# Altium PCB operacake.PcbDoc
Units mm, origin at the board's own origin, x right, y up, seen from the top; angles counter-clockwise.
Board outline 120 x 75 mm, 4 copper layers (F.Cu, In1.Cu, In2.Cu, B.Cu); 152 components, 63 nets, 801 pads, 182 vias.
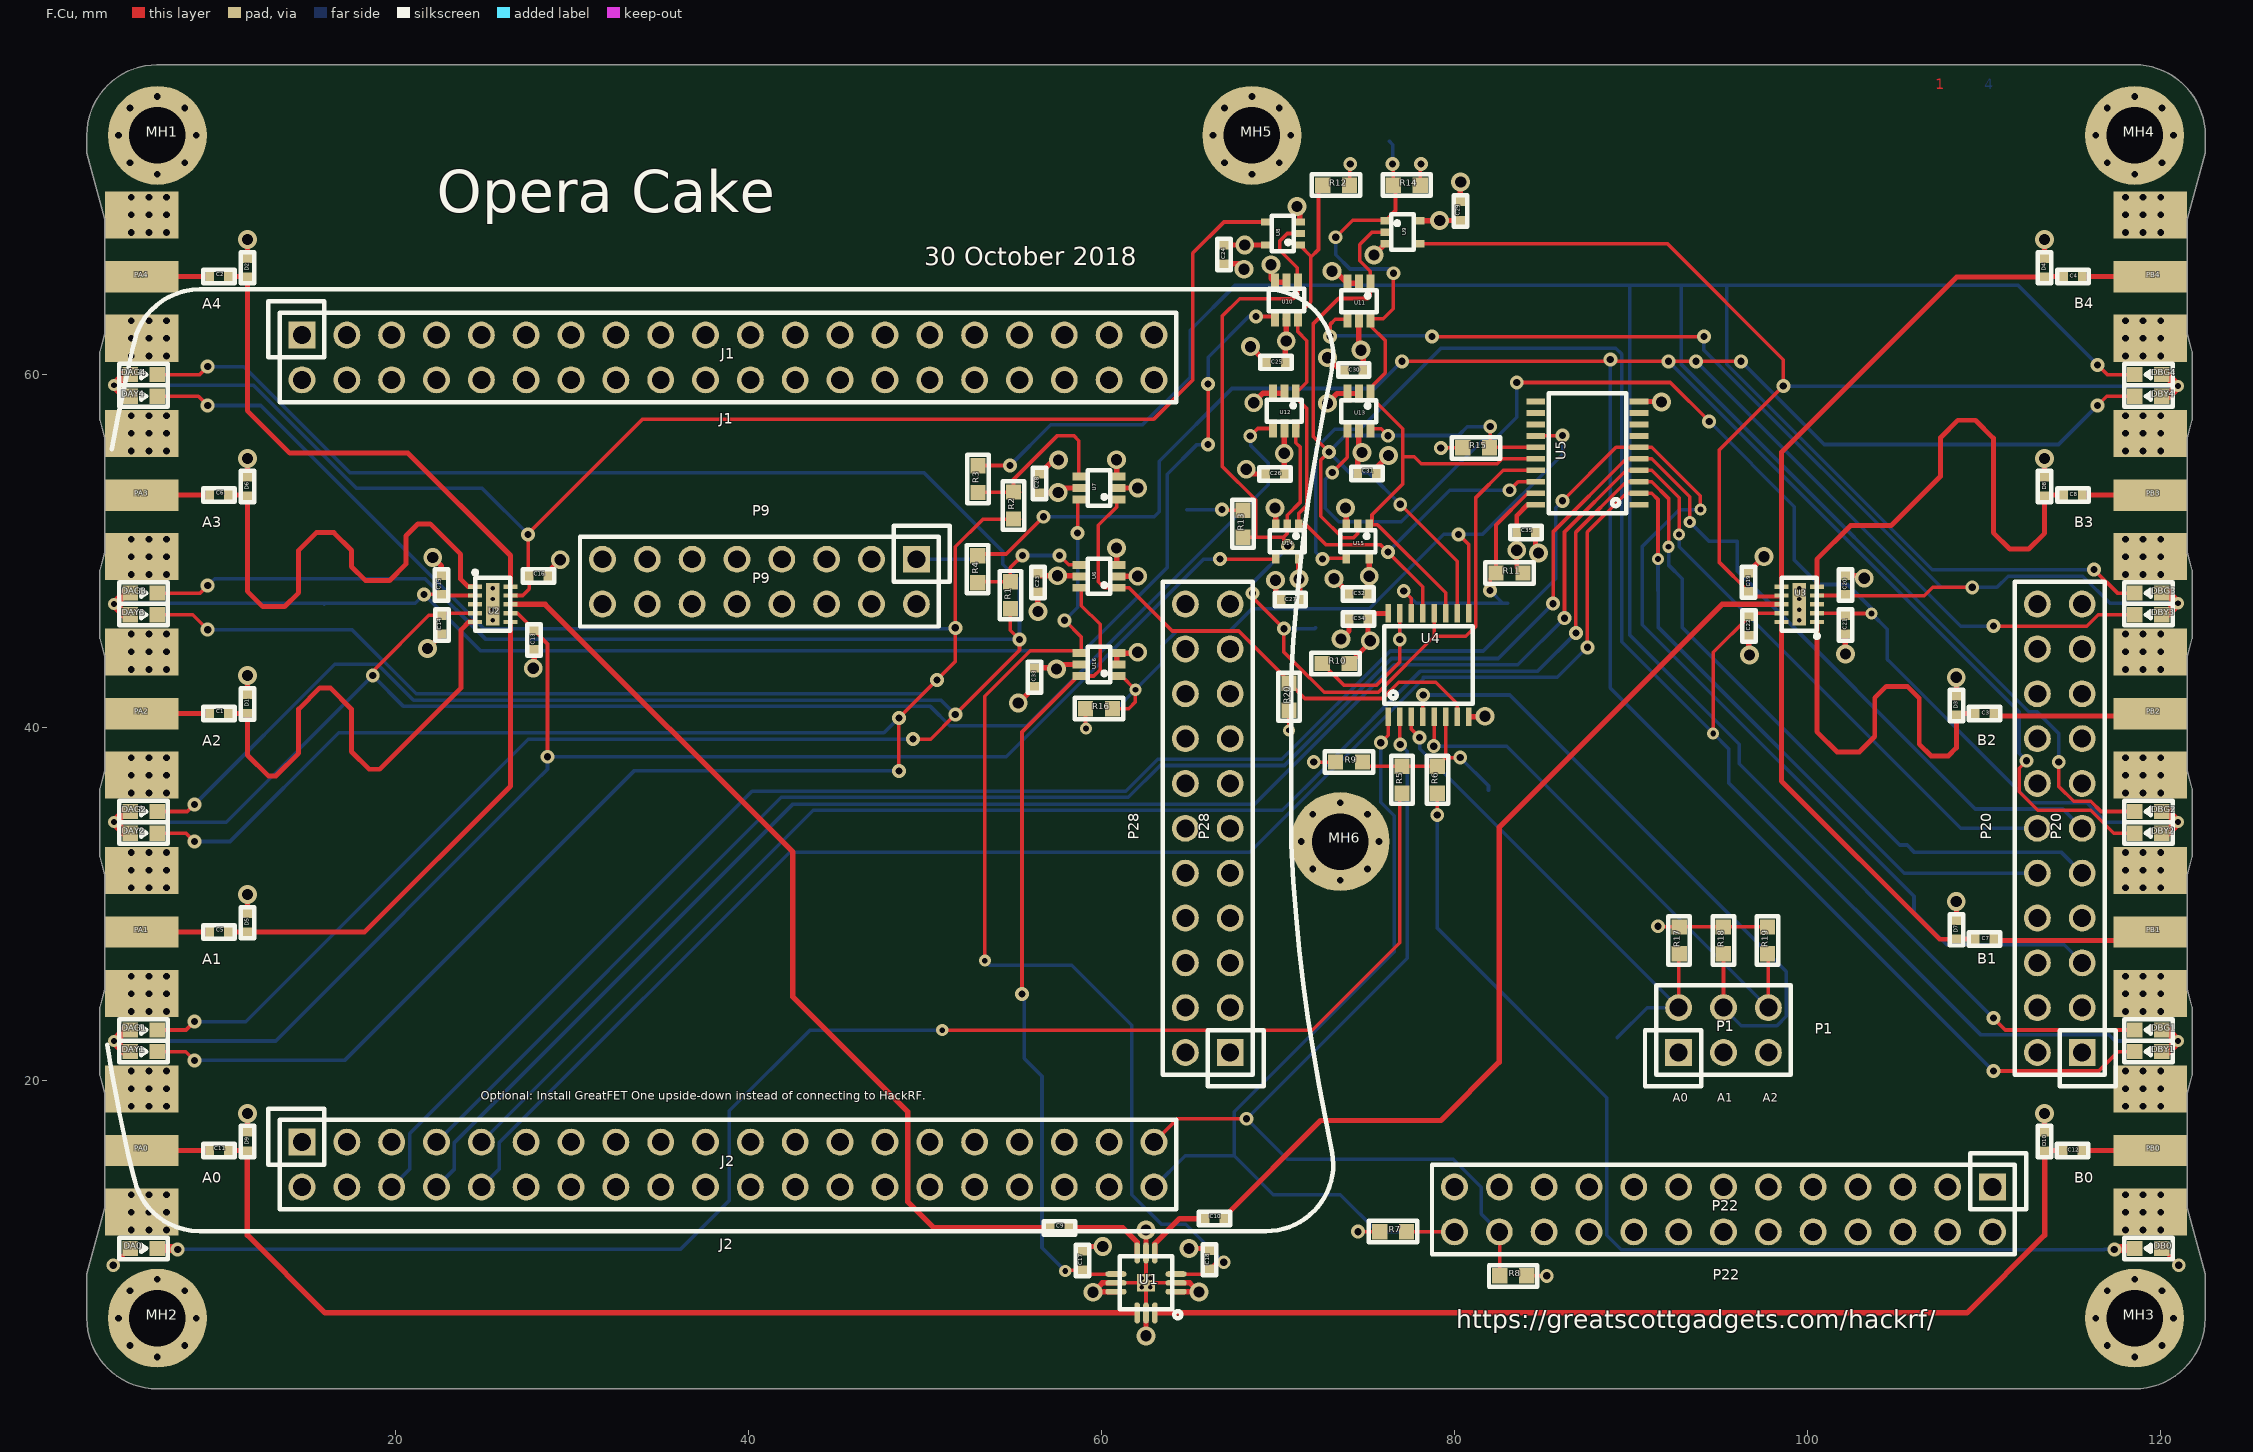
[diagram p0: F.Cu view]
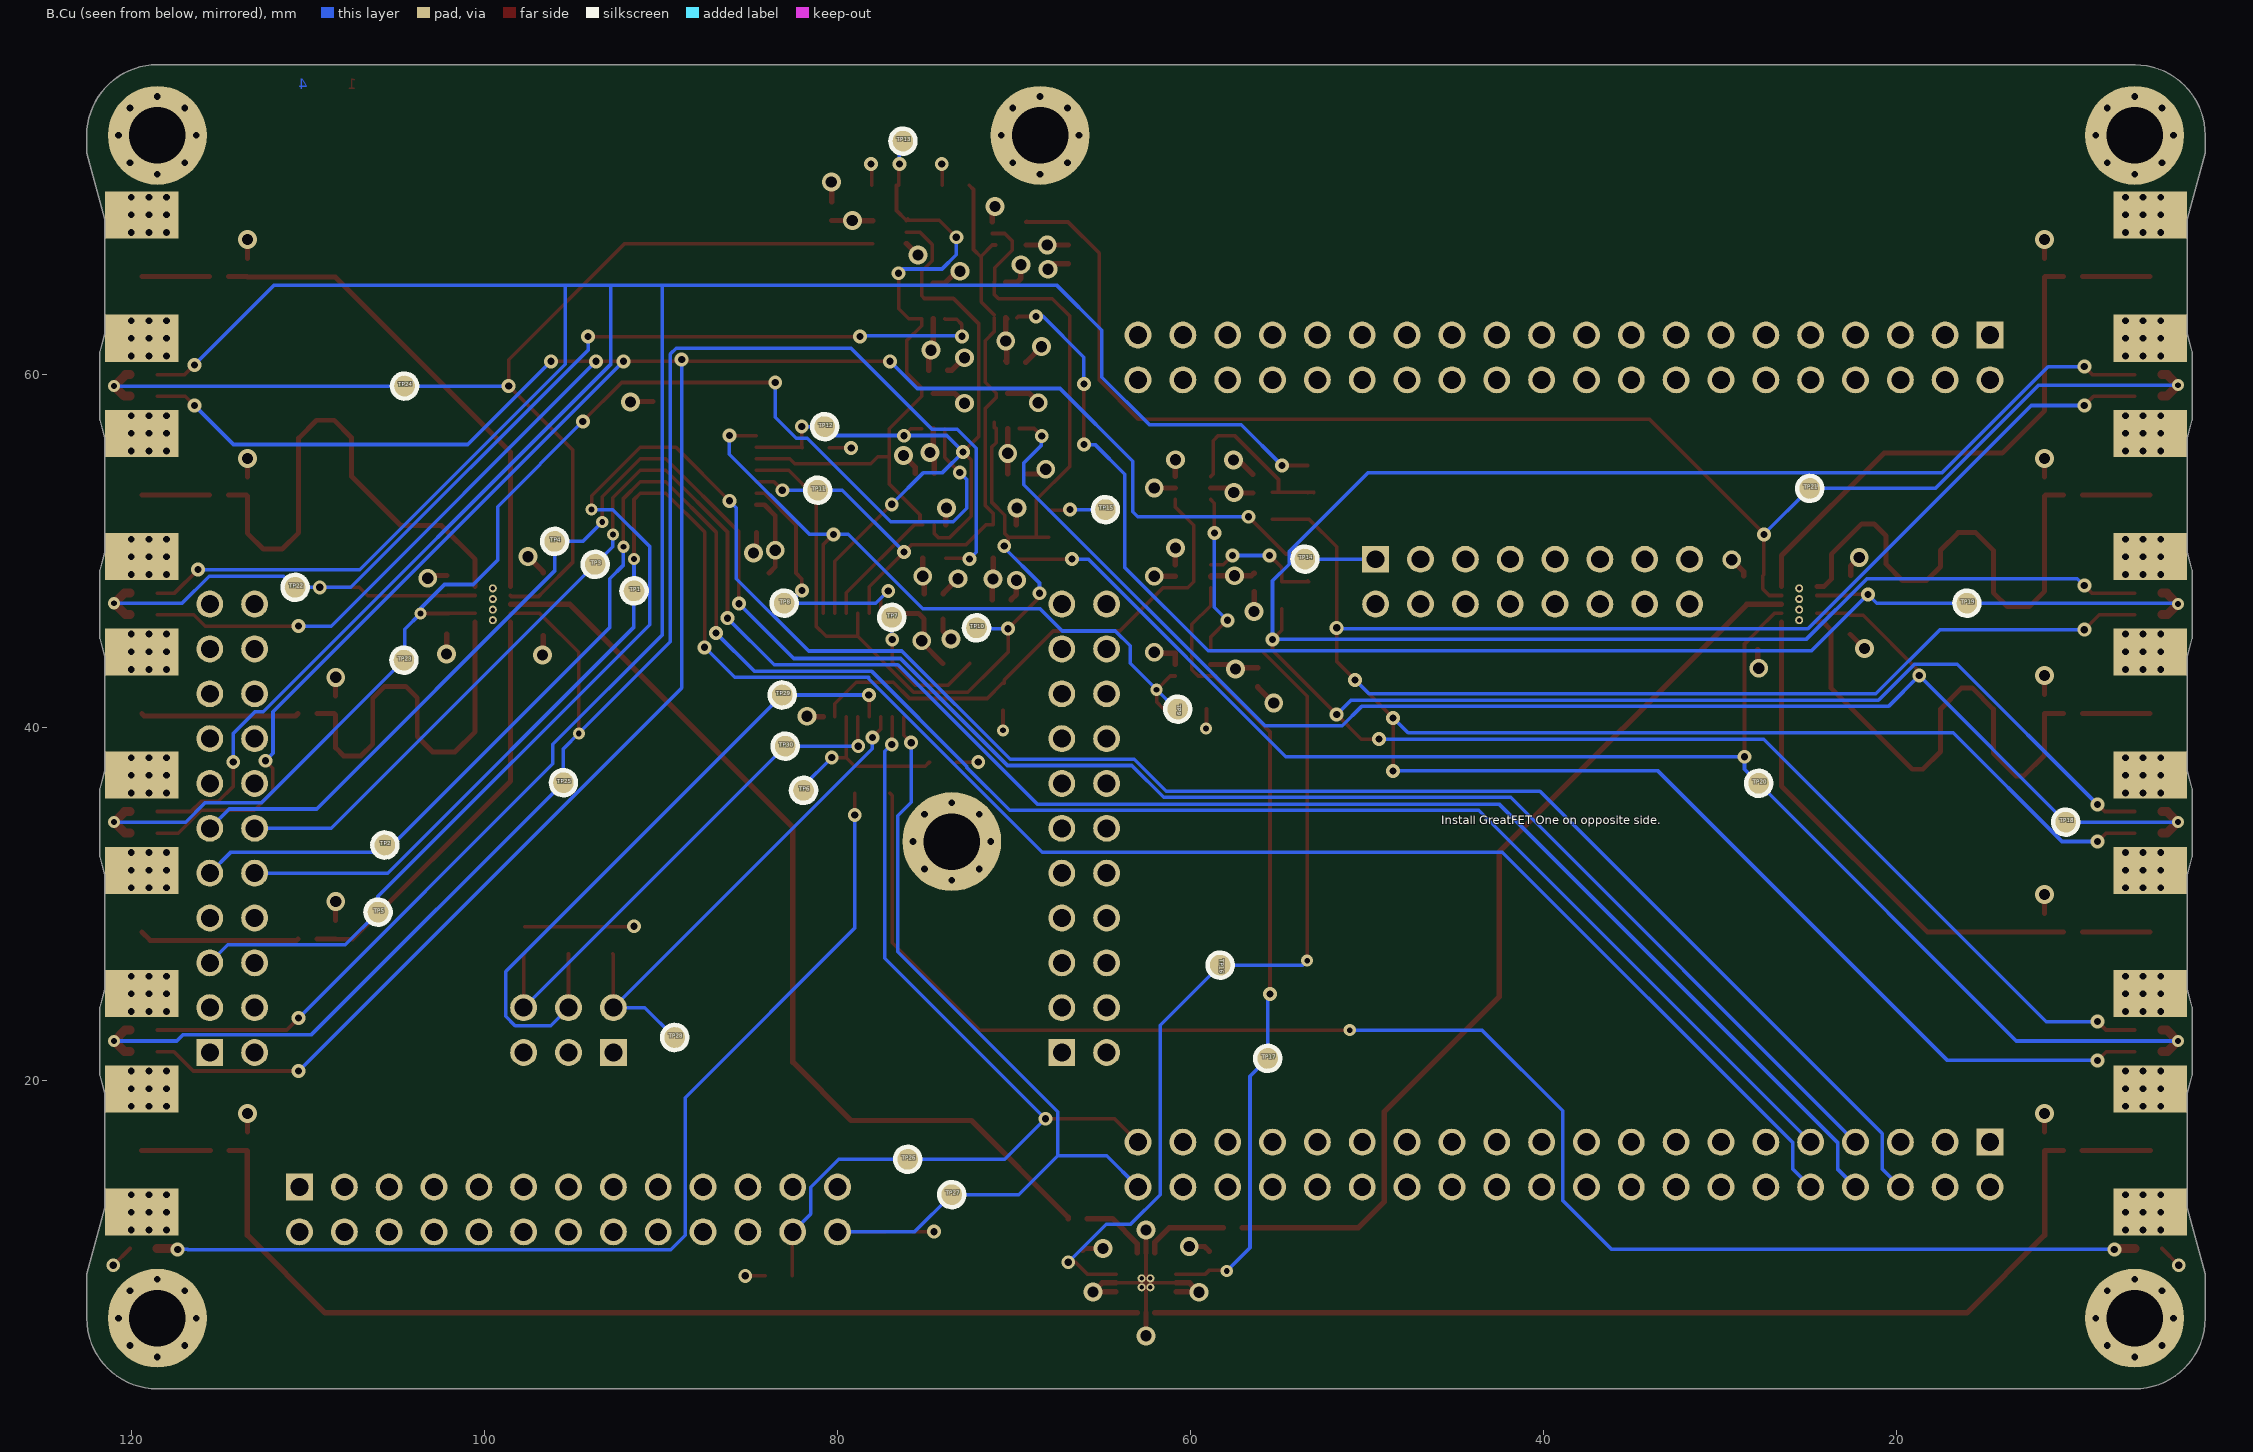
[diagram p1: B.Cu view, seen from below]
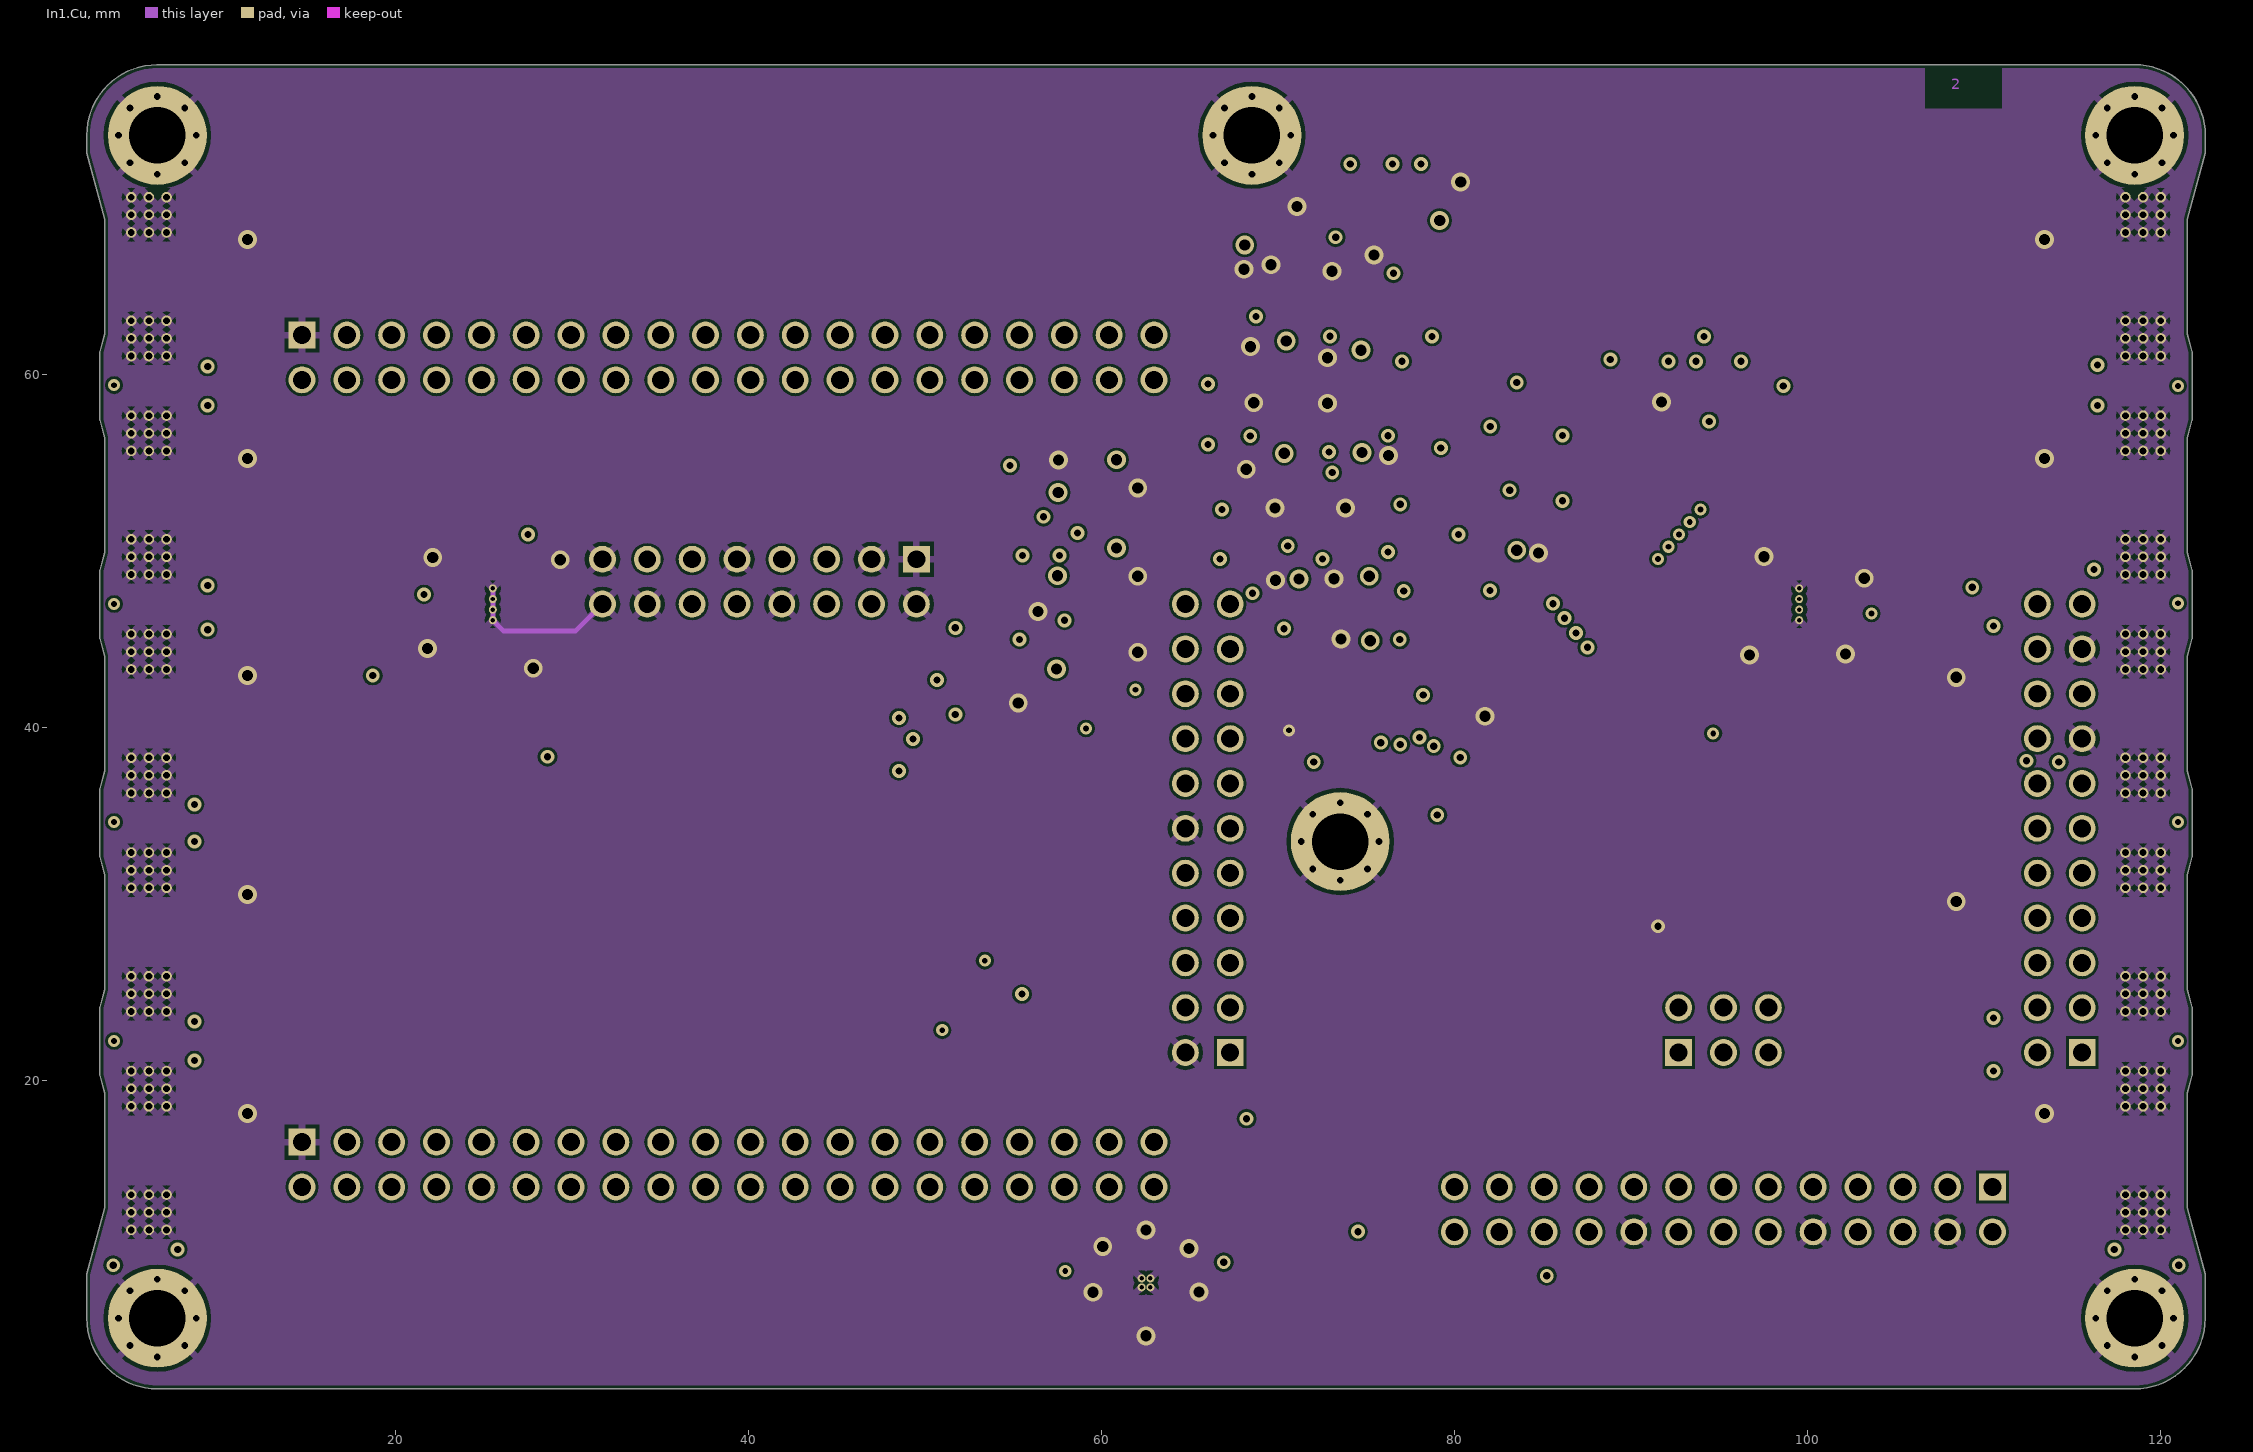
[diagram p2: In1.Cu]
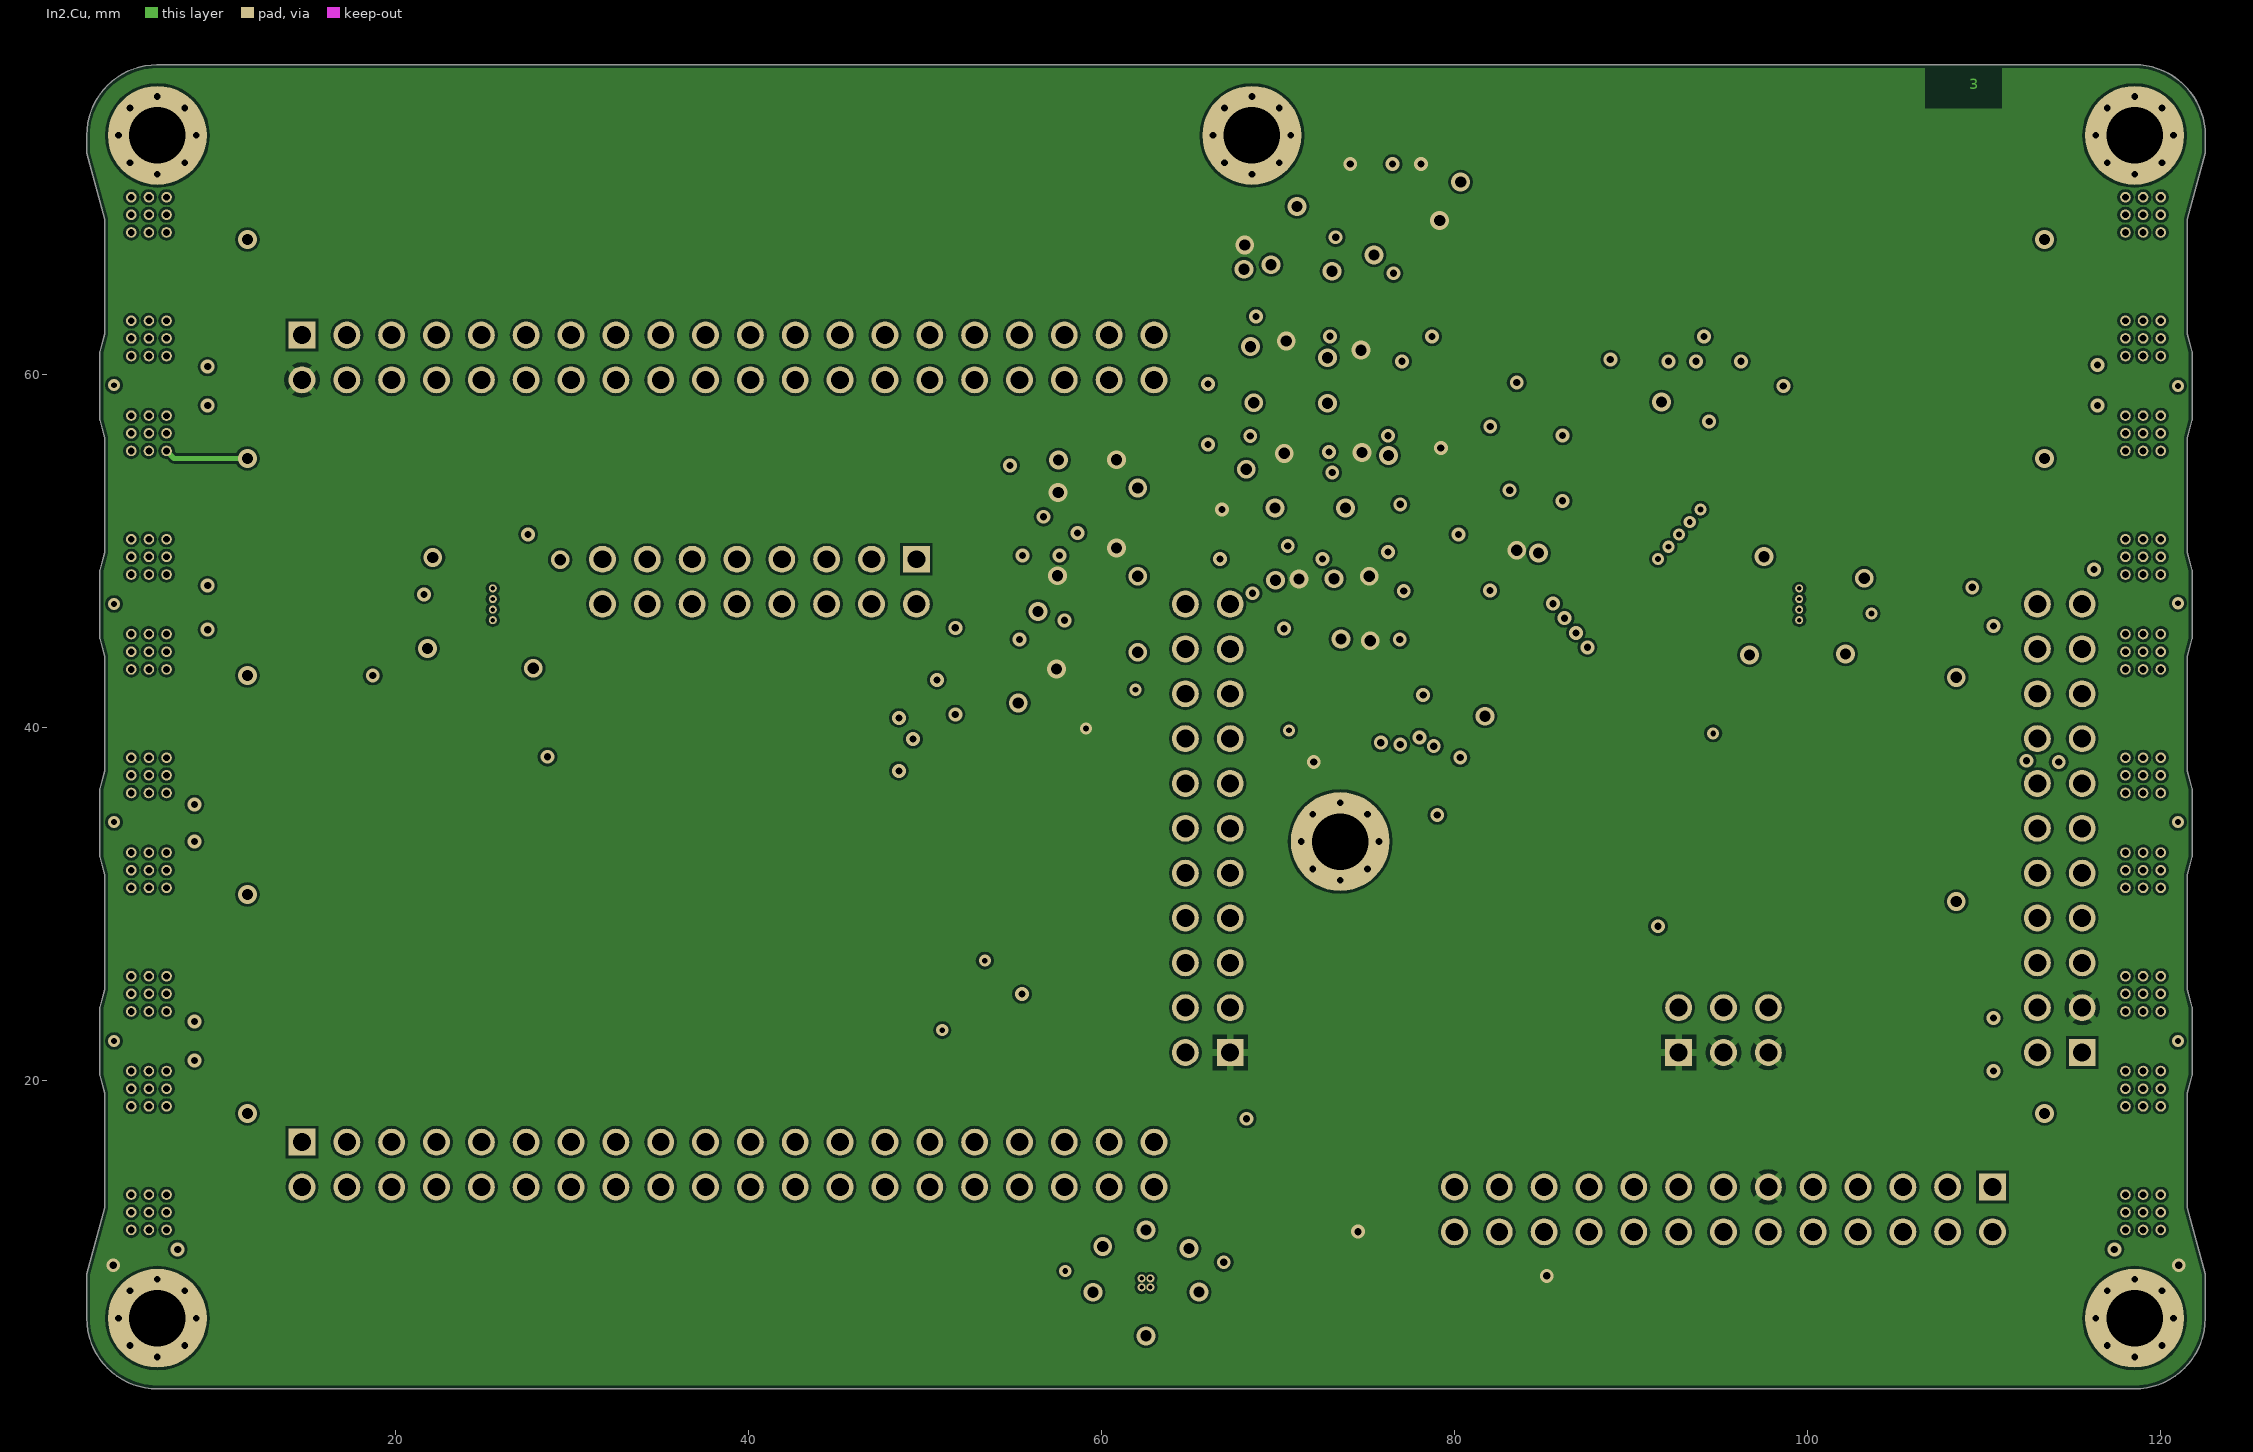
[diagram p3: In2.Cu]

## Layer stack, top to bottom
F.Mask: solder mask 0.0102, Solder Resist, Dk 3.5
F.Cu: signal copper 0.0356
Dielectric3: dielectric 0.32, FR-4, Dk 4.8
In1.Cu: signal copper 0.0356
Dielectric 1: dielectric 0.32, FR-4, Dk 4.8
In2.Cu: signal copper 0.0356
Dielectric2: dielectric 0.32, FR-4, Dk 4.8
B.Cu: signal copper 0.0356
B.Mask: solder mask 0.0102, Solder Resist, Dk 3.5

## Board outline
2.52,6.54 2.52,9.04 3.54,12.79 3.54,19.29 3.27,20.29 3.27,24.165 3.54,25.165 3.54,31.665 3.27,32.665 3.27,36.54 3.54,37.54 3.54,44.04 3.27,45.04 3.27,48.915 3.54,49.915 3.54,56.415 3.27,57.415 3.27,61.29 3.54,62.29 3.54,68.79 2.52,72.54 2.52,73.54 cw(c6.52,73.54) 6.52,77.54 118.52,77.54 cw(c118.52,73.54) 122.52,73.54 122.52,72.54 121.5,68.79 121.5,62.29 121.77,61.29 121.77,57.415 121.5,56.415 121.5,49.915 121.77,48.915 121.77,45.04 121.5,44.04 121.5,37.54 121.77,36.54 121.77,32.665 121.5,31.665 121.5,25.165 121.77,24.165 121.77,20.29 121.5,19.29 121.5,12.79 122.52,9.04 122.52,6.54 cw(c118.52,6.54) 118.52,2.54 6.52,2.54 cw(c6.52,6.54)

## Design rules (kind name [scope] priority, off if disabled: settings)
BoardOutlineClearance [All] p1: gap=0.2 ignorepadtopadclearanceinfootprint=FALSE except(0: SMDPad-OutlineEdge SMDPad-CavityEdge SMDPad-CutoutEdge SMDPad-SplitBarrior SMDPad-SplitContinuation)
Clearance "Clearence 0.3048_Polygon" [InNamedPolygon('In1.Cu-') OR InNamedPolygon('In2.Cu-')] p1: gap=0.15 ignorepadtopadclearanceinfootprint=FALSE
Clearance "Clearence 0.1778_PadClass" [InPadClass('Pad Class Clearance 0.1778')] p2: gap=0.178 ignorepadtopadclearanceinfootprint=FALSE
Clearance "Clearence 0.1524_PadClass" [InPadClass('Pad Class Clearance 0.1524')] p3: gap=0.152 ignorepadtopadclearanceinfootprint=FALSE
Clearance "Clearence 0.1524_NetClass" [InNetClass('Default')] p4: gap=0.152 ignorepadtopadclearanceinfootprint=FALSE
HoleSize [All] p1: absolutevalues=TRUE maxlimit=3.5 minlimit=0.025 maxpercent=80.000 minpercent=20.000
HoleToHoleClearance [All] p1: gap=0.23 allowstackedmicrovias=TRUE
MinimumSolderMaskSliver [All] p1: minsoldermaskwidth=0
PlaneClearance [All] p1: clearance=0.15
PlaneConnect [All] p1: planeconnectstyle=Direct reliefexpansion=0.508 reliefentries=4 reliefconductorwidth=0.254 reliefairgap=0.254
PolygonConnect Polygon_In2.Cu-_ConnectDirect [IsNamedPolygon('In2.Cu-') vs IsVia] p1: connectstyle=Direct reliefconductorwidth=0.254 reliefentries=4 polygonreliefangle="90 Angle" airgapwidth=0.254
PolygonConnect Polygon_In2.Cu-_ConnectRelief45 [IsNamedPolygon('In2.Cu-') vs (IsThruPin or IsSMTPin) and (PadShape_AllLayers = 'Round')] p2: thpad.connectstyle=Relief thpad.reliefconductorwidth=0.4 thpad.reliefentries=4 thpad.polygonreliefangle="45 Angle" thpad.airgapwidth=0.23 smdpad.connectstyle=Relief smdpad.reliefconductorwidth=0.508 smdpad.reliefentries=4 smdpad.polygonreliefangle="45 Angle" smdpad.airgapwidth=0.305 via.connectstyle=Direct via.reliefconductorwidth=0.508 via.reliefentries=4 via.polygonreliefangle="45 Angle" via.airgapwidth=0.305
PolygonConnect Polygon_In2.Cu-_ConnectRelief90 [IsNamedPolygon('In2.Cu-') vs (IsThruPin or IsSMTPin) and (PadShape_AllLayers <> 'Round')] p3: thpad.connectstyle=Relief thpad.reliefconductorwidth=0.4 thpad.reliefentries=4 thpad.polygonreliefangle="90 Angle" thpad.airgapwidth=0.23 smdpad.connectstyle=Direct smdpad.reliefconductorwidth=0.508 smdpad.reliefentries=4 smdpad.polygonreliefangle="90 Angle" smdpad.airgapwidth=0.305 via.connectstyle=Direct via.reliefconductorwidth=0.508 via.reliefentries=4 via.polygonreliefangle="90 Angle" via.airgapwidth=0.305
PolygonConnect Polygon_In1.Cu-_ConnectDirect [IsNamedPolygon('In1.Cu-') vs IsVia] p4: connectstyle=Direct reliefconductorwidth=0.254 reliefentries=4 polygonreliefangle="90 Angle" airgapwidth=0.254
PolygonConnect Polygon_In1.Cu-_ConnectRelief45 [IsNamedPolygon('In1.Cu-') vs (IsThruPin or IsSMTPin) and (PadShape_AllLayers = 'Round')] p5: thpad.connectstyle=Relief thpad.reliefconductorwidth=0.4 thpad.reliefentries=4 thpad.polygonreliefangle="45 Angle" thpad.airgapwidth=0.225 smdpad.connectstyle=Direct smdpad.reliefconductorwidth=0.508 smdpad.reliefentries=4 smdpad.polygonreliefangle="45 Angle" smdpad.airgapwidth=0.305 via.connectstyle=Direct via.reliefconductorwidth=0.508 via.reliefentries=4 via.polygonreliefangle="45 Angle" via.airgapwidth=0.305
PolygonConnect Polygon_In1.Cu-_ConnectRelief90 [IsNamedPolygon('In1.Cu-') vs (IsThruPin or IsSMTPin) and (PadShape_AllLayers <> 'Round')] p6: thpad.connectstyle=Relief thpad.reliefconductorwidth=0.4 thpad.reliefentries=4 thpad.polygonreliefangle="90 Angle" thpad.airgapwidth=0.225 smdpad.connectstyle=Direct smdpad.reliefconductorwidth=0.508 smdpad.reliefentries=4 smdpad.polygonreliefangle="90 Angle" smdpad.airgapwidth=0.305 via.connectstyle=Direct via.reliefconductorwidth=0.508 via.reliefentries=4 via.polygonreliefangle="90 Angle" via.airgapwidth=0.305
RoutingVias [All] p1: holewidth=0.711 width=1.27 viastyle="Through Hole" minholewidth=0.711 minwidth=1.27 maxholewidth=0.711 maxwidth=1.27
SilkToSilkClearance [All] p1: silktosilkclearance=0
SilkToSolderMaskClearance [IsPad] p1: minsilkscreentomaskgap=0 clearancetoexposedcopper=TRUE
SolderMaskExpansion [All] p1: expansion=0 istentingtop=FALSE
SupplyNets "Schematic Supply Nets_1" [InNet('GND')] p1: voltage=0.000
SupplyNets "Schematic Supply Nets" [InNet('VCC')] p2: voltage=0.000
Width [All] p1: maxlimit=1 minlimit=0.2 preferedwidth=0.279
23 further rules are at their usual default settings.

## Classes and differential pairs
pad class "Pad Class Clearance 0.1524": U1-0 U1-1 U1-2 U1-3 U1-4 U1-5 U1-6 U1-7 U1-8 U1-9 U1-10 U1-11 U1-12
pad class "Pad Class Clearance 0.1778": DA0-1 DA0-2 DAG1-1 DAG1-2 DAG2-1 DAG2-2 DAG3-1 DAG3-2 DAG4-1 DAG4-2 DAY1-1 DAY1-2 DAY2-1 DAY2-2 DAY3-1 DAY3-2 DAY4-1 DAY4-2 DB0-1 DB0-2 DBG1-1 DBG1-2 DBG2-1 DBG2-2 DBG3-1 DBG3-2 DBG4-1 DBG4-2 DBY1-1 DBY1-2 DBY2-1 DBY2-2 DBY3-1 DBY3-2 DBY4-1 DBY4-2 R1-1 R1-2 R2-1 R2-2 R3-1 R3-2 R4-1 R4-2 R5-1 R5-2 R6-1 R6-2 R7-1 R7-2 R8-1 R8-2 R9-1 R9-2 R10-1 R10-2 R11-1 R11-2 R12-1 R12-2 R13-1 R13-2 R14-1 R14-2 R15-1 R15-2 R16-1 R16-2 R17-1 R17-2 R18-1 R18-2 R19-1 R19-2 R20-1 R20-2

## Components (designator, comment, footprint, x,y, rotation, side; value= is the part's Value field where it differs from the comment)
C1 "100nF" 0402#1 10.02,40.79 r180 top
C2 "100nF" 0402#1 10.02,65.54 r180 top
C3 "100nF" 0402#1 110.02,40.79 r0 top
C4 "100nF" 0402#1 115.02,65.54 r0 top
C5 "100nF" 0402#1 10.02,28.415 r180 top
C6 "100nF" 0402#1 10.02,53.165 r180 top
C7 "100nF" 0402#1 110.02,28.015 r0 top
C8 "100nF" 0402#1 115.02,53.165 r0 top
C9 "100nF" 0402#1 57.612,11.653 r180 top
C10 "100nF" 0402#1 66.391,12.176 r180 top
C11 "100nF" 0402#1 10.02,16.04 r180 top
C12 "100nF" 0402#1 114.995,16.04 r0 top
C13 "33pF" 0402#2 27.864,44.952 r270 top
C14 "33pF" 0402#2 22.631,45.816 r270 top
C15 "33pF" 0402#2 22.606,48.076 r270 top
C16 "33pF" 0402#2 28.118,48.584 r180 top
C17 "33pF" 0402#2 58.928,9.798 r270 top
C18 "33pF" 0402#2 66.116,9.849 r270 top
C19 "33pF" 0402#2 96.657,48.229 r90 top
C20 "33pF" 0402#2 102.133,48.076 r90 top
C21 "33pF" 0402#2 102.133,45.816 r90 top
C22 "33pF" 0402#2 96.672,45.744 r90 top
C23 "100nF" 0402#2 56.393,48.213 r90 top
C24 "100nF" 0402#2 66.932,66.799 r90 top
C25 "100nF" 0402#2 69.875,60.687 r0 top
C26 "100nF" 0402#2 69.82,54.355 r0 top
C27 "100nF" 0402#2 70.688,47.238 r0 top
C28 "100nF" 0402#2 56.477,53.814 r270 top
C29 "100nF" 0402#2 80.328,69.252 r270 top
C30 "100nF" 0402#2 74.285,60.238 r0 top
C31 "100nF" 0402#2 75.047,54.396 r180 top
C32 "100nF" 0402#2 74.544,47.558 r0 top
C33 "100nF" 0402#2 56.192,42.849 r90 top
C34 "100nF" 0402#2 74.559,46.151 r0 top
C35 "100nF" 0402#2 84.054,51.04 r180 top
D1 "GSG-DIODE-TVS-BI" 0402#1 11.62,41.34 r90 top
D2 "GSG-DIODE-TVS-BI" 0402#1 11.62,66.04 r90 top
D3 "GSG-DIODE-TVS-BI" 0402#1 108.42,41.24 r90 top
D4 "GSG-DIODE-TVS-BI" 0402#1 113.42,66.04 r90 top
D5 "GSG-DIODE-TVS-BI" 0402#1 11.62,28.94 r90 top
D6 "GSG-DIODE-TVS-BI" 0402#1 11.62,53.64 r90 top
D7 "GSG-DIODE-TVS-BI" 0402#1 108.42,28.54 r90 top
D8 "GSG-DIODE-TVS-BI" 0402#1 113.42,53.64 r90 top
D9 "GSG-DIODE-TVS-BI" 0402#1 11.62,16.54 r90 top
D10 "GSG-DIODE-TVS-BI" 0402#1 113.42,16.54 r90 top
DA0 "LED" 0603D 5.745,10.49 r180 top
DAG1 "LED" 0603D 5.745,22.865 r180 top
DAG2 "LED" 0603D 5.745,35.24 r180 top
DAG3 "LED" 0603D 5.745,47.615 r180 top
DAG4 "LED" 0603D 5.745,59.99 r180 top
DAY1 "LED" 0603D 5.745,21.64 r180 top
DAY2 "LED" 0603D 5.745,34.015 r180 top
DAY3 "LED" 0603D 5.745,46.39 r180 top
DAY4 "LED" 0603D 5.745,58.765 r180 top
DB0 "LED" 0603D 119.295,10.49 r0 top
DBG1 "LED" 0603D 119.295,22.865 r0 top
DBG2 "LED" 0603D 119.295,35.24 r0 top
DBG3 "LED" 0603D 119.295,47.615 r0 top
DBG4 "LED" 0603D 119.295,59.99 r0 top
DBY1 "LED" 0603D 119.295,21.64 r0 top
DBY2 "LED" 0603D 119.295,34.015 r0 top
DBY3 "LED" 0603D 119.295,46.39 r0 top
DBY4 "LED" 0603D 119.295,58.765 r0 top
J1 "CONN_02X20" HEADER-2x20-REVERSE 38.842,60.96 r0 top
J2 "CONN_02X20" HEADER-2x20-REVERSE 38.842,15.24 r0 top
MH1 "MOUNTING_HOLE" HOLE126MIL-COPPER 6.52,73.54 r0 top
MH2 "MOUNTING_HOLE" HOLE126MIL-COPPER 6.52,6.54 r0 top
MH3 "MOUNTING_HOLE" HOLE126MIL-COPPER 118.52,6.54 r0 top
MH4 "MOUNTING_HOLE" HOLE126MIL-COPPER 118.52,73.54 r0 top
MH5 "MOUNTING_HOLE" HOLE126MIL-COPPER 68.52,73.54 r0 top
MH6 "MOUNTING_HOLE" HOLE126MIL-COPPER 73.52,33.54 r0 top
P1 "ADDRESS" HEADER-2x3 95.23,22.86 r0 top
P9 "BASEBAND" HEADER-2x8 40.62,48.26 r180 top
P20 "GPIO" HEADER-2x11 114.28,34.29 r90 top
P22 "I2S" HEADER-2x13 95.23,12.7 r180 top
P28 "SD" HEADER-2x11 66.02,34.29 r90 top
PA0 "GSG-RF-CONN" GSG-SMA-73251-2120 3.54,16.04 r0 top
PA1 "GSG-RF-CONN" GSG-SMA-73251-2120 3.54,28.415 r0 top
PA2 "GSG-RF-CONN" GSG-SMA-73251-2120 3.54,40.79 r0 top
PA3 "GSG-RF-CONN" GSG-SMA-73251-2120 3.54,53.165 r0 top
PA4 "GSG-RF-CONN" GSG-SMA-73251-2120 3.54,65.54 r0 top
PB0 "GSG-RF-CONN" GSG-SMA-73251-2120 121.5,16.04 r180 top
PB1 "GSG-RF-CONN" GSG-SMA-73251-2120 121.5,28.415 r180 top
PB2 "GSG-RF-CONN" GSG-SMA-73251-2120 121.5,40.79 r180 top
PB3 "GSG-RF-CONN" GSG-SMA-73251-2120 121.5,53.165 r180 top
PB4 "GSG-RF-CONN" GSG-SMA-73251-2120 121.5,65.54 r180 top
R1 "330" 0603 54.839,47.492 r90 top
R2 "330" 0603 55.016,52.572 r90 top
R3 "330" 0603 53.01,54.071 r270 top
R4 "330" 0603 52.984,48.965 r270 top
R5 "330" 0603 77.02,37.04 r90 top
R6 "330" 0603 79.02,37.04 r90 top
R7 "1k8" 0603 76.52,11.44 r0 top
R8 "1k8" 0603 83.32,8.94 r180 top
R9 "10k" 0603 74.02,38.04 r0 top
R10 "10k" 0603 73.264,43.626 r0 top
R11 "10k" 0603 83.109,48.747 r0 top
R12 "10k" 0603 73.29,70.716 r0 top
R13 "10k" 0603 68.02,51.54 r90 top
R14 "10k" 0603 77.29,70.716 r0 top
R15 "10k" 0603 81.22,55.84 r180 top
R16 "10k" 0603 59.857,41.064 r180 top
R17 "10k" 0603 92.72,27.94 r90 top
R18 "10k" 0603 95.22,27.94 r90 top
R19 "10k" 0603 97.72,27.94 r90 top
R20 "10k" 0603 70.62,41.74 r270 top
TP1 "CONN_1" TESTPOINT-50MIL 91.52,47.74 r180 bottom
TP2 "CONN_1" TESTPOINT-50MIL 105.634,33.342 r180 bottom
TP3 "CONN_1" TESTPOINT-50MIL 93.72,49.24 r180 bottom
TP4 "CONN_1" TESTPOINT-50MIL 96.02,50.54 r180 bottom
TP5 "CONN_1" TESTPOINT-50MIL 106.02,29.54 r180 bottom
TP6 "CONN_1" TESTPOINT-50MIL 81.92,36.44 r180 bottom
TP7 "CONN_1" TESTPOINT-50MIL 76.92,46.24 r180 bottom
TP8 "CONN_1" TESTPOINT-50MIL 83.02,47.04 r180 bottom
TP9 "CONN_1" TESTPOINT-50MIL 60.72,41.04 r270 bottom
TP10 "CONN_1" TESTPOINT-50MIL 72.12,45.64 r180 bottom
TP11 "CONN_1" TESTPOINT-50MIL 81.12,53.44 r180 bottom
TP12 "CONN_1" TESTPOINT-50MIL 80.72,57.04 r180 bottom
TP13 "CONN_1" TESTPOINT-50MIL 76.29,73.216 r180 bottom
TP14 "CONN_1" TESTPOINT-50MIL 53.52,49.54 r180 bottom
TP15 "CONN_1" TESTPOINT-50MIL 64.82,52.34 r180 bottom
TP16 "CONN_1" TESTPOINT-50MIL 58.32,26.54 r270 bottom
TP17 "CONN_1" TESTPOINT-50MIL 55.626,21.254 r180 bottom
TP18 "CONN_1" TESTPOINT-50MIL 10.42,34.64 r180 bottom
TP19 "CONN_1" TESTPOINT-50MIL 16.02,47.04 r180 bottom
TP20 "CONN_1" TESTPOINT-50MIL 27.82,36.84 r180 bottom
TP21 "CONN_1" TESTPOINT-50MIL 24.92,53.54 r180 bottom
TP22 "CONN_1" TESTPOINT-50MIL 110.72,47.94 r180 bottom
TP23 "CONN_1" TESTPOINT-50MIL 104.551,43.814 r180 bottom
TP24 "CONN_1" TESTPOINT-50MIL 104.52,59.34 r180 bottom
TP25 "CONN_1" TESTPOINT-50MIL 95.52,36.872 r180 bottom
TP26 "CONN_1" TESTPOINT-50MIL 76.02,15.54 r180 bottom
TP27 "CONN_1" TESTPOINT-50MIL 73.52,13.54 r180 bottom
TP28 "CONN_1" TESTPOINT-50MIL 89.22,22.44 r180 bottom
TP29 "CONN_1" TESTPOINT-50MIL 83.12,41.84 r180 bottom
TP30 "CONN_1" TESTPOINT-50MIL 82.96,38.94 r180 bottom
U1 "MASWSS0129" QFN12-3 62.52,8.54 r180 top
U2 "SKY13322" SKY13322-375LF 25.52,46.978 r0 top
U3 "SKY13322" SKY13322-375LF 99.52,46.978 r180 top
U4 "PCA9557" TSSOP16 78.52,43.54 r90 top
U5 "TC7MBL3245CFT" TSSOP20 87.52,55.54 r180 top
U6 "74LVC1G58" SOT363 59.857,48.564 r90 top
U7 "74LVC1G58" SOT363 59.857,53.564 r90 top
U8 "74AHC1G08" SOT353-1 70.27,67.98 r90 top
U9 "74AHC1G08" SOT353-1 77.05,68.062 r270 top
U10 "74LVC1G58" SOT363 70.475,64.215 r180 top
U11 "74LVC1G58" SOT363 74.579,64.154 r180 top
U12 "74LVC1G58" SOT363 70.353,57.936 r180 top
U13 "74LVC1G58" SOT363 74.574,57.921 r180 top
U14 "74AHC1G02" SOT353-1 70.52,50.54 r180 top
U15 "74AHC1G02" SOT353-1 74.52,50.54 r180 top
U16 "74LVC1G19" SOT363 59.857,43.564 r90 top

## Footprints (in the part's own frame and the unit in brackets; to place one, negate y for a bottom-side part, rotate by r counter-clockwise, add the part's x,y. Pads: shape width x height; smd on the part's side, far side on the other; paste and mask are expansions set on the pad)
0402#1 [mil]
  rect 20x22 smd mask+4: 1(-21,0) 2(21,0)
  silkscreen extent -35,-15 35,15
0402#2 [mil]
  rect 20x22 smd mask+3: 1(-21,0) 2(21,0)
  silkscreen extent -35,-15 35,15
0603 [mil]
  rect 34x34 smd mask+4: 1(-30,0) 2(30,0)
  silkscreen extent -54,-24 54,24
0603D [mil]
  rect 34x34 smd mask+4: 1(-30,0) 2(30,0)
  silkscreen extent -54,-24 54,24
GSG-SMA-73251-2120 [mm]
  rect 4.19x1.78 smd paste-4.19 mask+0.076: 1(2.095,0)
  round 0.6 hole 0.381 mask+0.076: 2(1.5,-4.5) 2(1.5,-3.5) 2(1.5,-2.5) 2(1.5,2.5) 2(1.5,3.5) 2(1.5,4.5) 2(2.5,-4.5) 2(2.5,-3.5) 2(2.5,-2.5) 2(2.5,2.5) 2(2.5,3.5) 2(2.5,4.5) 2(3.5,-4.5) 2(3.5,-3.5) 2(3.5,-2.5) 2(3.5,2.5) 2(3.5,3.5) 2(3.5,4.5)
  rect 4.19x2.665 smd paste-4.19 mask+0.076: 2(2.095,-3.492) 2(2.095,3.492)
  rect 4.19x2.665 smd far side paste-4.19 mask+0.076: 2(2.095,-3.492) 2(2.095,3.492)
HEADER-2x3 [mil]
  rect 60x60 hole 40 mask+3: 1(-100,-50)
  round 60 hole 40 mask+3: 2(-100,50) 3(0,-50) 4(0,50) 5(100,-50) 6(100,50)
  silkscreen extent -175,-125 150,100
HEADER-2x8 [mil]
  rect 60x60 hole 40 mask+3: 1(-350,-50)
  round 60 hole 40 mask+3: 2(-350,50) 3(-250,-50) 4(-250,50) 5(-150,-50) 6(-150,50) 7(-50,-50) 8(-50,50) 9(50,-50) 10(50,50) 11(150,-50) 12(150,50) 13(250,-50) 14(250,50) 15(350,-50) 16(350,50)
  silkscreen extent -425,-125 400,100
HEADER-2x11 [mil]
  rect 60x60 hole 40 mask+3: 1(-500,-50)
  round 60 hole 40 mask+3: 2(-500,50) 3(-400,-50) 4(-400,50) 5(-300,-50) 6(-300,50) 7(-200,-50) 8(-200,50) 9(-100,-50) 10(-100,50) 11(0,-50) 12(0,50) 13(100,-50) 14(100,50) 15(200,-50) 16(200,50) 17(300,-50) 18(300,50) 19(400,-50) 20(400,50) 21(500,-50) 22(500,50)
  silkscreen extent -575,-125 550,100
HEADER-2x13 [mil]
  rect 60x60 hole 40 mask+3: 1(-600,-50)
  round 60 hole 40 mask+3: 2(-600,50) 3(-500,-50) 4(-500,50) 5(-400,-50) 6(-400,50) 7(-300,-50) 8(-300,50) 9(-200,-50) 10(-200,50) 11(-100,-50) 12(-100,50) 13(0,-50) 14(0,50) 15(100,-50) 16(100,50) 17(200,-50) 18(200,50) 19(300,-50) 20(300,50) 21(400,-50) 22(400,50) 23(500,-50) 24(500,50) 25(600,-50) 26(600,50)
  silkscreen extent -675,-125 650,100
HEADER-2x20-REVERSE [mil]
  rect 60x60 hole 40 mask+3: 1(-950,50)
  round 60 hole 40 mask+3: 2(-950,-50) 3(-850,50) 4(-850,-50) 5(-750,50) 6(-750,-50) 7(-650,50) 8(-650,-50) 9(-550,50) 10(-550,-50) 11(-450,50) 12(-450,-50) 13(-350,50) 14(-350,-50) 15(-250,50) 16(-250,-50) 17(-150,50) 18(-150,-50) 19(-50,50) 20(-50,-50) 21(50,50) 22(50,-50) 23(150,50) 24(150,-50) 25(250,50) 26(250,-50) 27(350,50) 28(350,-50) 29(450,50) 30(450,-50) 31(550,50) 32(550,-50) 33(650,50) 34(650,-50) 35(750,50) 36(750,-50) 37(850,50) 38(850,-50) 39(950,50) 40(950,-50)
  silkscreen extent -1025,-100 1000,125
HOLE126MIL-COPPER [mm]
  round 0.6 hole 0.381 mask+0.076: 1(-2.2,0) 1(-1.55,-1.55) 1(-1.55,1.55) 1(0,-2.2) 1(0,2.2) 1(1.55,-1.55) 1(1.55,1.55) 1(2.2,0)
  round 5.6 hole 3.2 mask+0.076: 1(0,0)
QFN12-3 [mm]
  rect 0.5x0.5 smd mask-0.5: 0(-0.25,0.25) 0(-0.25,-0.25) 0(0.25,0.25) 0(0.25,-0.25)
  round 0.457 hole 0.254 mask+0.071: 0(-0.25,0.25) 0(-0.25,-0.25) 0(0.25,0.25) 0(0.25,-0.25)
  rect 1x1 smd paste-1 mask-0.099: 0(0,0)
  rrect100% 1.2x0.32 smd mask+0.071: 1(-1.7,0.5) 2(-1.7,0) 3(-1.7,-0.5) 7(1.7,-0.5) 8(1.7,0) 9(1.7,0.5)
  rrect100% 0.32x1.2 smd mask+0.071: 4(-0.5,-1.7) 5(0,-1.7) 6(0.5,-1.7) 10(0.5,1.7) 11(0,1.7) 12(-0.5,1.7)
  silkscreen extent -2,-1.5 1.5,2
SKY13322-375LF [mm]
  round 0.457 hole 0.254 mask+0.076: 0(0,-0.9) 0(0,-0.3) 0(0,0.3) 0(0,0.9)
  rect 0.76x2.4 smd mask+0.076: 0(0,0)
  rect 0.8x0.25 smd mask+0.076: 1(-1,1) 2(-1,0.5) 3(-1,0) 4(-1,-0.5) 5(-1,-1) 6(1,-1) 7(1,-0.5) 8(1,0) 9(1,0.5) 10(1,1)
  silkscreen extent -1.1,-1.5 1,1.9
SOT353-1 [mm]
  rect 0.42x0.6 smd mask+0.076: 1(-0.65,-0.95) 2(0,-0.95) 3(0.65,-0.95) 4(0.65,0.95) 5(-0.65,0.95)
  silkscreen extent -1,-0.63 1,0.63
SOT363 [mm]
  rect 0.45x1 smd mask+0.076: 1(-0.65,-1) 2(0,-1) 3(0.65,-1) 4(0.65,1) 5(0,1) 6(-0.65,1)
  silkscreen extent -1,-0.63 1,0.63
TESTPOINT-50MIL [mm]
  round 1.27 smd paste-1.27 mask+0.076: 1(0,0)
  silkscreen extent -0.71,-0.71 0.71,0.71
TSSOP16 [mm]
  rect 1.05x0.32 smd mask+0.076: 1(-2.925,2.275) 2(-2.925,1.625) 3(-2.925,0.975) 4(-2.925,0.325) 5(-2.925,-0.325) 6(-2.925,-0.975) 7(-2.925,-1.625) 8(-2.925,-2.275) 9(2.925,-2.275) 10(2.925,-1.625) 11(2.925,-0.975) 12(2.925,-0.325) 13(2.925,0.325) 14(2.925,0.975) 15(2.925,1.625) 16(2.925,2.275)
  silkscreen extent -2.2,-2.5 2.2,2.5
TSSOP20 [mm]
  rect 1.05x0.32 smd mask+0.076: 1(-2.925,2.925) 2(-2.925,2.275) 3(-2.925,1.625) 4(-2.925,0.975) 5(-2.925,0.325) 6(-2.925,-0.325) 7(-2.925,-0.975) 8(-2.925,-1.625) 9(-2.925,-2.275) 10(-2.925,-2.925) 11(2.925,-2.925) 12(2.925,-2.275) 13(2.925,-1.625) 14(2.925,-0.975) 15(2.925,-0.325) 16(2.925,0.325) 17(2.925,0.975) 18(2.925,1.625) 19(2.925,2.275) 20(2.925,2.925)
  silkscreen extent -2.2,-3.4 2.2,3.4

## Part data
C1 C2 C3 C4 C5 C6 C7 C8 C9 C10 C11 C12 C23 C24 C25 C26 C27 C28 C29 C30 C31 C32 C33 C34 C35: library part C, Manufacturer=Murata, Part Number=GRM155R61A104KA01D
C13 C14 C15 C16 C17 C18 C19 C20 C21 C22: library part C, Manufacturer=Murata, Part Number=GRM1555C1H330JA01D
D1 D2 D3 D4 D5 D6 D7 D8 D9 D10: Manufacturer=Murata, Part Number=LXES15AAA1-153
DA0 DAG1 DAG2 DAG3 DAG4 DBG1 DBG2 DBG3 DBG4: Manufacturer=Lumex, Part Number=SML-LX0603GW-TR
DAY1 DAY2 DAY3 DAY4 DB0 DBY1 DBY2 DBY3 DBY4: Manufacturer=Lumex, Part Number=SML-LX0603YW-TR
MH1 MH2 MH3 MH4 MH5 MH6: library part CONN_1, Note=DNP
P1: library part CONN_02X03, Manufacturer=Omron, Part Number=XG8T-0631
P9: library part CONN_02X08, Manufacturer=Samtec, Part Number=SSQ-108-03-G-D, Note=DNP
P20 P28: library part CONN_02X11, Manufacturer=Samtec, Part Number=SSQ-111-03-G-D
  P20: Desciption="CONN RCPT .100\" 22POS DUAL GOLD"
P22: library part CONN_02X13, Manufacturer=Samtec, Part Number=SSQ-113-03-G-D
PA0 PA1 PA2 PA3 PA4 PB0 PB1 PB2 PB3 PB4: Manufacturer=Molex, Part Number=73251-2121
R1 R2 R3 R4 R5 R6: library part R, Manufacturer=Stackpole, Part Number=RMCF0603JT330R
R7 R8: library part R, Note=DNP
R9 R10 R11 R12 R13 R14 R15 R16 R17 R18 R19 R20: library part R, Manufacturer=Panasonic, Part Number=ERJ-3GEYJ103V
U1: Manufacturer=M/A-Com, Part Number=MASWSS0129TR-3000
U2 U3: Manufacturer=Skyworks, Part Number=SKY13322-375LF
U4: Manufacturer=NXP, Part Number=PCA9557PW,118
U5: Manufacturer=Toshiba, Part Number=TC7MBL3245CFT(EL)
U6 U7 U10 U11 U12 U13: Manufacturer="Diodes Inc.", Part Number=74LVC1G58DW-7
U8 U9: Manufacturer="Diodes Inc.", Part Number=74AHC1G08SE-7
U14 U15: library part 74AHC1G08, Manufacturer="Diodes Inc.", Part Number=74AHC1G02SE-7
U16: Manufacturer=NXP, Part Number=74LVC1G19GW,125
J1 J2 TP1 TP2 TP3 TP4 TP5 TP6 TP7 TP8 TP9 TP10 TP11 TP12 TP13 TP14 TP15 TP16 TP17 TP18 TP19 TP20 TP21 TP22 TP23 TP24 TP25 TP26 TP27 TP28 TP29 TP30: Note=DNP

## Via types
v1: diameter 0.787, hole 0.406, F.Cu to B.Cu, tented both sides, 96 vias
v2: diameter 1.067, hole 0.635, F.Cu to B.Cu, tented both sides, 65 vias
v3: diameter 0.686, hole 0.33, F.Cu to B.Cu, tented both sides, 21 vias

## Nets (pads, with @x,y where several pads share a name; then routed paths per layer and width w, separated by ;. In a path a pad name is that pad's centre, name@x,y a point inside that pad or via, vN(x,y) a via of type N, cw(c..) or ccw(c..) an arc to the next point about the centre after c; other vN are vias at no path point)
!LED_EN: R5.2 R6.2 R9.2 TP6.1 U4.6 | length 10.7
  F.Cu w0.203: R9.2 75.02,37.802 R5.2 R6.2 79.495,38.277 ; U4.6 79.495,38.277 ; v1(80.32,38.292) 80.305,38.277 79.495,38.277
  B.Cu w0.203: v1(80.32,38.292) 81.92,36.692 TP6.1
!OE: R11.1 TP8.1 U4.14 U5.19 | length 16.4
  F.Cu w0.203: v1(77.12,47.74) 77.545,47.315 U4.14 ; v1(82.012,47.756) 82.012,48.411 R11.1 82.347,51.467 84.145,53.265 U5.19
  B.Cu w0.203: v1(77.12,47.74) 77.82,47.04 TP8.1 ; v1(82.012,47.756) TP8.1@82.728,47.04 ; TP8.1@82.728,47.04 TP8.1 ; TP8.1@82.728,47.04 TP8.1 ; TP8.1@82.728,47.04 TP8.1
!RESET: R10.1 TP7.1 U4.15 | length 9.5
  F.Cu w0.203: R10.1 73.736,42.392 75.58,42.392 76.895,43.706 v1(76.895,44.98) U4.15
  B.Cu w0.203: v1(76.895,44.98) 76.92,45.005 TP7.1
A0: P1.2 R17.1 TP28.1 U4.3 | length 30
  F.Cu w0.203: U4.3 77.545,39.915 v1(78.02,39.44) ; P1.2 92.69,27.148 R17.1
  B.Cu w0.203: v1(78.02,39.44) 78.02,38.8 P1.2 90.91,24.13 TP28.1
A1: P1.4 R18.1 TP29.1 U4.4 | length 38.1
  F.Cu w0.203: U4.4 78.195,41.815 v1(78.22,41.84) ; R18.1 95.23,27.168 P1.4
  B.Cu w0.203: v1(78.22,41.84) TP29.1 98.786,26.174 98.786,23.642 98.257,23.114 96.246,23.114 P1.4
A2: P1.6 R19.1 TP30.1 U4.5 | length 29.8
  F.Cu w0.203: v1(78.82,38.94) 78.845,38.965 U4.5 ; R19.1 97.77,27.128 P1.6
  B.Cu w0.203: v1(78.82,38.94) TP30.1 P1.6
EXT_U1CTRL: J2.6 P20.5 TP5.1 U5.6 | length 138.9
  F.Cu w0.203: v1(86.12,52.84) 89.145,55.865 U5.6 91.173,55.865 93.92,53.118 v3(93.92,52.34)
  B.Cu w0.203: J2.6 20.808,14.986 20.808,16.998 40.206,36.396 61.373,36.396 63.179,38.202 70.217,38.202 76.348,44.333 81.628,44.333 85.726,48.431 85.726,52.446 v1(86.12,52.84) ; v3(93.92,52.34) 92.72,52.34 90.631,50.251 90.631,45.827 106.02,30.438 TP5.1 107.874,27.686 114.534,27.686 P20.5
EXT_U2CTRL0: J2.9 P20.9 TP2.1 U5.3 | length 122.6
  F.Cu w0.203: v1(86.872,45.356) 86.872,51.07 89.717,53.915 U5.3 91.173,53.915 92.12,52.968 v3(92.12,50.24)
  B.Cu w0.203: J2.9 43.668,35.306 70.244,35.306 72.668,37.729 72.668,37.791 78.073,43.196 84.712,43.196 v1(86.872,45.356) ; v3(92.12,50.24) 92.12,49.202 92.893,48.429 92.893,45.663 105.214,33.342 TP2.1 106.053,32.923 114.379,32.923 115.55,31.752 P20.9
EXT_U2CTRL1: J2.10 P20.10 TP1.1 U5.2 | length 122.3
  F.Cu w0.203: v1(87.52,44.54) 87.52,51.068 89.717,53.265 U5.2 91.173,53.265 91.52,52.918 v3(91.52,49.54)
  B.Cu w0.203: J2.10 25.888,14.986 25.888,16.49 42.338,32.94 68.4,32.94 78.22,42.76 78.22,42.84 85.82,42.84 v1(87.52,44.54) ; v3(91.52,49.54) TP1.1 91.524,47.736 91.524,45.691 105.465,31.75 P20.10 P20.10@113,31.74
EXT_U3CTRL0: J2.7 P20.11 TP4.1 U5.5 | length 122.1
  F.Cu w0.203: v1(85.577,47.013) 85.577,51.075 89.717,55.215 U5.5 91.173,55.215 93.32,53.068 v3(93.32,51.64)
  B.Cu w0.203: J2.7 41.862,36.04 61.52,36.04 63.326,37.846 70.364,37.846 76.425,43.907 82.47,43.907 v1(85.577,47.013) ; v3(93.32,51.64) 94.42,50.54 TP4.1 96.02,48.863 109.499,35.384 114.455,35.384 P20.11
EXT_U3CTRL1: J2.8 P20.12 TP3.1 U5.4 | length 121.3
  F.Cu w0.203: v1(86.224,46.191) 86.224,51.073 89.717,54.565 U5.4 91.173,54.565 92.72,53.018 v3(92.72,50.94)
  B.Cu w0.203: J2.8 23.348,14.986 23.348,16.49 42.52,35.662 68.683,35.662 76.572,43.551 83.584,43.551 v1(86.224,46.191) ; v3(92.72,50.94) 92.72,50.24 TP3.1 108.67,34.29 P20.12
GND: C13.2 C14.2 C15.1 C16.1 C17.1 C18.1 C19.2 C20.2 C21.1 C22.1 C23.1 C24.1 C25.1 C26.1 C27.1 C28.1 C29.1 C30.1 C31.1 C32.1 C33.1 C34.1 C35.1 D1.2 D2.2 D3.2 D4.2 D5.2 D6.2 D7.2 D8.2 D9.2 D10.2 J1.1 J2.1 MH1.1 MH2.1 MH3.1 MH4.1 MH5.1 MH6.1 P9.1 P9.2 P9.3 P9.8 P9.9 P9.14 P9.15 P9.16 P20.15 P20.19 P22.4 P22.10 P22.18 P28.2 P28.12 PA0.2 PA1.2 PA2.2 PA3.2 PA4.2 PB0.2 PB1.2 PB2.2 PB3.2 PB4.2 R17.2 R18.2 R19.2 R20.2 TP14.1 U1.0 U1.1 U1.2 U1.5 U1.8 U1.9 U1.11 U2.0 U3.0 U4.8 U5.10 U6.2 U7.2 U8.3 U9.3 U10.2 U10.3 U11.2 U11.3 U12.2 U12.3 U13.2 U13.3 U14.3 U15.3 U16.2 U16.3 | length 97.4
  F.Cu w0.203: U1.8 U1.0@62.52,8.54 ; U1.0@62.27,8.29 U1.0@62.52,8.54 ; U1.0@62.27,8.79 U1.0@62.52,8.54 ; U1.11 U1.0@62.52,8.54 ; U1.5 U1.0@62.52,8.54 ; U1.0@62.77,8.29 U1.0@62.52,8.54 ; U1.0@62.77,8.79 U1.0@62.52,8.54 ; U1.2 U1.0@62.52,8.54 ; v3(70.62,39.84) R20.2 ; v1(91.52,28.74) 91.558,28.702 R17.2 R18.2 R19.2
  F.Cu w0.279: D9.2 v2(11.62,18.14) ; D5.2 v2(11.62,30.54) ; D1.2 v2(11.62,42.94) ; D6.2 v2(11.62,55.24) ; D2.2 v2(11.62,67.64) ; v2(21.819,44.469) C14.2 ; v2(73.566,45.008) 74.026,45.468 C34.1 ; v2@84.587,50.045 C35.1 C35.1@84.595,51.048 ; D7.2 v2(108.42,30.14) ; D3.2 v2(108.42,42.84) ; D10.2 v2(113.42,18.14) ; D8.2 v2(113.42,55.24) ; D4.2 v2(113.42,67.64)
  F.Cu w0.305: v2(22.123,49.626) 22.606,49.143 C15.1 ; v2@27.864,43.403 C13.2 ; C16.1 28.651,48.813 v2(29.337,49.499) ; v2(55.288,41.386) 56.192,42.29 C33.1 ; C23.1 56.398,47.675 v2(56.398,46.578) ; C28.1 57.277,55.148 v2(57.567,55.148) ; C17.1 59.197,10.601 v2(60.066,10.601) ; U1.9 59.549,8.04 v2(59.52,8.011) 60.049,8.54 U1.8 ; U16.2 U16.3 62.007,44.214 v2(62.057,44.264) ; U6.2 v2(62.057,48.564) ; U7.2 v2(62.057,53.564) ; v2(62.52,5.54) U1.11 ; U1.5 v2(62.52,11.54) ; U1.1 65.499,8.04 v2(65.522,8.016) 64.999,8.54 U1.2 ; v2(64.948,10.489) 66.01,10.489 C18.1 ; C24.1 67.762,66.265 v2(68.067,65.96) ; v2(68.194,54.624) 68.463,54.355 C26.1 ; v2(68.445,61.571) 69.329,60.687 C25.1 ; v2(68.621,58.399) 69.158,58.936 U12.3 U12.2 ; v2(69.606,66.212) 69.606,65.434 U10.3 U10.2 ; v2(69.82,52.44) 69.87,52.39 U14.3 ; v2(69.863,48.335) 69.863,47.53 C27.1 ; U8.3 v2@71.22,69.363 ; v2(72.796,58.368) 73.349,58.921 U13.3 U13.2 ; v2(72.807,60.946) 73.515,60.238 C30.1 ; v2(73.061,65.846) 73.238,65.846 U11.3 U11.2 ; v2(73.172,48.427) 74.011,47.589 C32.1 ; v2(73.82,52.44) 73.87,52.39 U15.3 ; v2(75.438,66.771) 76.08,67.412 U9.3 ; C31.1 75.58,54.731 v2(76.261,55.412) ; C29.1 v2@80.328,70.875 ; U4.8 81.695,40.615 v2(81.72,40.64) ; U5.10 91.695,58.465 v2(91.72,58.44) ; C19.2 96.657,48.808 v2(97.526,49.676) ; v2@96.672,44.144 C22.1 ; v2@102.133,44.17 C21.1 ; C20.2 103.048,48.61 v2(103.2,48.457)
  In1.Cu w0.279: U2.0@25.52,47.878 25.52,47.278 25.52,46.678 25.52,46.077 26.137,45.46 30.2,45.46 P9.16
  In2.Cu w0.279: PA3.2@7.04,55.665 7.465,55.24 v2(11.62,55.24)
  B.Cu w0.203: P9.1 49.52,49.54 TP14.1
  B.Cu w0.279: v2@21.793,44.469 v2(21.819,44.469) ; v2(73.566,45.008) v2@73.566,45.021
  other v2: 27.813,43.352 96.703,44.114 102.144,44.16 84.755,49.877 71.069,69.514 80.343,70.89
LED_EN2: R20.1 U4.7 U6.1 U7.1 | length 29.9
  F.Cu w0.203: U7.1 60.857,52.486 59.82,51.449 59.82,48.248 60.153,47.914 U6.1 61.56,47.914 64.008,45.466 67.777,45.466 70.558,42.686 70.558,42.502 R20.1 70.658,42.502 71.52,41.64 75.92,41.64 76.842,42.562 78.926,42.562 80.145,41.343 U4.7
NetC1_1: C1.1 D1.1 U2.5 | length 29.1
  F.Cu w0.279: C1.1 11.603,40.79 D1.1 11.62,38.44 12.799,37.261 13.24,37.261 14.52,38.54 14.52,41.04 15.723,42.243 16.317,42.243 17.52,41.04 17.52,38.634 18.52,37.634 19.113,37.634 23.724,42.244 23.724,45.536 24.165,45.978 U2.5
NetC1_2: C1.2 PA2.1 | length 3.9
  F.Cu w0.279: PA2.1 C1.2
NetC2_1: C2.1 D2.1 U2.10 | length 28.7
  F.Cu w0.279: C2.1 11.586,65.54 D2.1 11.62,57.94 14.02,55.54 20.72,55.54 26.52,49.74 U2.10
NetC2_2: C2.2 PA4.1 | length 3.9
  F.Cu w0.279: PA4.1 C2.2
NetC3_1: C3.1 D3.1 U3.1 | length 23.7
  F.Cu w0.279: U3.1 100.52,39.758 101.666,38.612 102.926,38.612 103.8,39.486 103.8,41.68 104.45,42.331 105.649,42.331 106.319,41.66 106.319,39.059 106.99,38.389 107.965,38.389 108.42,38.843 D3.1 108.503,40.79 C3.1
NetC3_2: C3.2 PB2.1 | length 9
  F.Cu w0.279: C3.2 110.693,40.65 119.265,40.65 PB2.1
NetC4_1: C4.1 D4.1 U3.6 | length 27.7
  F.Cu w0.279: U3.6 98.52,55.6 108.426,65.507 D4.1 113.453,65.54 C4.1
NetC4_2: C4.2 PB4.1 | length 3.9
  F.Cu w0.279: C4.2 PB4.1
NetC5_1: C5.1 D5.1 U2.6 | length 28.7
  F.Cu w0.279: C5.1 11.611,28.415 D5.1 18.246,28.407 26.52,36.68 U2.6
NetC5_2: C5.2 PA1.1 | length 3.9
  F.Cu w0.279: PA1.1 C5.2
NetC6_1: C6.1 D6.1 U2.1 | length 29.1
  F.Cu w0.279: C6.1 11.561,53.165 D6.1 11.62,47.72 12.495,46.845 13.723,46.845 14.52,47.642 14.52,50.04 15.52,51.04 16.52,51.04 17.52,50.04 17.52,49.115 18.317,48.318 19.672,48.318 20.599,49.245 20.599,50.845 21.285,51.531 21.971,51.531 23.698,49.803 23.698,48.406 24.127,47.978 U2.1
NetC6_2: C6.2 PA3.1 | length 3.9
  F.Cu w0.279: PA3.1 C6.2
NetC7_1: C7.1 D7.1 U3.10 | length 23.7
  F.Cu w0.279: U3.10 98.52,36.96 107.473,28.007 D7.1 108.428,28.015 C7.1
NetC7_2: C7.2 PB1.1 | length 9.1
  F.Cu w0.279: C7.2 110.628,27.94 118.93,27.94 PB1.1
NetC8_1: C8.1 D8.1 U3.5 | length 28.7
  F.Cu w0.279: U3.5 100.52,49.531 102.433,51.444 104.735,51.444 107.52,54.229 107.52,56.418 108.505,57.403 109.505,57.403 110.52,56.388 110.52,51.04 111.46,50.1 112.51,50.1 113.42,51.01 D8.1 113.478,53.165 C8.1
NetC8_2: C8.2 PB3.1 | length 3.9
  F.Cu w0.279: C8.2 PB3.1
NetC9_1: C9.1 U1.6 | length 5.1
  F.Cu w0.305: C9.1 61.214,11.653 62.02,10.847 U1.6 U1.6@62.02,10.567
NetC9_2: C9.2 U2.8 | length 53
  F.Cu w0.305: U2.8 28.482,46.978 42.52,32.94 42.52,24.74 49.02,18.24 49.02,13.14 50.507,11.653 C9.2
NetC10_1: C10.1 U3.8 | length 53.8
  F.Cu w0.305: C10.1 66.924,12.25 72.414,17.74 79.22,17.74 82.52,21.04 82.52,34.34 95.157,46.978 U3.8
NetC10_2: C10.2 U1.4 | length 3.9
  F.Cu w0.305: U1.4 63.02,10.766 64.43,12.176 C10.2
NetC11_1: C11.1 D9.1 U1.10 | length 58.1
  F.Cu w0.305: C11.1 11.586,16.04 D9.1 11.62,11.24 16.02,6.84 U1.10
NetC11_2: C11.2 PA0.1 | length 3.9
  F.Cu w0.305: PA0.1 C11.2
NetC12_1: C12.1 D10.1 U1.12 | length 58
  F.Cu w0.305: U1.12 109.02,6.84 113.42,11.24 D10.1 113.453,16.04 C12.1
NetC12_2: C12.2 PB0.1 | length 3.9
  F.Cu w0.305: C12.2 PB0.1
NetDA0_1: DA0.1 R5.1 | length 89.1
  F.Cu w0.203: v3(50.978,22.854) 71.933,22.854 76.886,27.807 76.886,36.144 R5.1
  F.Cu w0.508: DA0.1 7.62,10.49 v1(7.67,10.44)
  B.Cu w0.203: v1(7.67,10.44) 36.151,10.44 38.913,13.202 38.913,18.282 43.485,22.854 v3(50.978,22.854)
NetDAG1_1: DAG1.1 DAG2.1 DAG3.1 DAG4.1 R1.1 | length 218.6
  F.Cu w0.203: DAG1.1 8.145,22.865 v1(8.62,23.34) ; DAG2.1 8.22,35.24 v1(8.62,35.64) ; DAG3.1 8.945,47.615 v1(9.37,48.04) ; DAG4.1 8.92,59.99 v1(9.37,60.44) ; v1(49.32,39.34) 50.32,39.34 v1(51.72,40.74) 55.357,44.377 v1(55.357,44.988) 54.839,45.506 R1.1
  B.Cu w0.203: v1(8.62,23.34) 11.52,23.34 27.52,39.34 v1(49.32,39.34) ; v1(8.62,35.64) 16.568,43.588 18.992,43.588 21.031,41.548 50.911,41.548 v1(51.72,40.74) ; v1(9.37,48.04) 9.763,48.434 21.685,48.434 25.131,44.988 v1(55.357,44.988) 55.357,48.303 54.409,49.251 54.409,49.967 49.936,54.44 17.423,54.44 11.423,60.44 v1(9.37,60.44)
NetDAY1_1: DAY1.1 DAY2.1 DAY3.1 DAY4.1 R2.1 | length 209.5
  F.Cu w0.203: DAY1.1 8.12,21.64 v1(8.62,21.14) ; DAY2.1 8.145,34.015 v1(8.62,33.54) ; DAY3.1 8.52,46.39 v1(9.37,45.54) ; DAY4.1 8.845,58.765 v1(9.37,58.24) ; v1(48.52,37.54) v1(48.52,40.54) v1(50.678,42.698) 51.72,43.74 v1(51.72,45.647) 51.72,50.24 53.282,51.802 R2.1@55.357,51.802
  B.Cu w0.203: v1(8.62,21.14) 17.12,21.14 33.52,37.54 v1(48.52,37.54) ; v1(8.62,33.54) 10.636,33.54 16.791,39.696 47.675,39.696 v1(48.52,40.54) ; v1(9.37,45.54) 17.542,45.54 21.178,41.904 49.884,41.904 v1(50.678,42.698) ; v1(9.37,58.24) 12.381,58.24 25.026,45.595 51.668,45.595 v1(51.72,45.647)
NetDB0_1: DB0.1 R6.1 | length 59.3
  F.Cu w0.203: v1(79.02,35.04) R6.1
  F.Cu w0.508: v1(117.37,10.44) 117.42,10.49 DB0.1
  B.Cu w0.203: v1(79.02,35.04) 79.02,28.64 88.626,19.034 88.626,11.234 89.446,10.414 116.787,10.414 116.813,10.44 v1(117.37,10.44)
NetDBG1_1: DBG1.1 DBG2.1 DBG3.1 DBG4.1 R3.1 | length 206.7
  F.Cu w0.203: R3.1@53.357,54.826 53.37,54.84 v1(54.82,54.84) ; v1(110.52,23.54) 111.195,22.865 DBG1.1 ; v1(114.22,38.04) 114.22,36.656 115.062,35.814 116.037,35.814 116.611,35.24 DBG2.1 ; v1(116.22,48.94) 117.545,47.615 DBG3.1 ; v1(116.42,60.54) 116.97,59.99 DBG4.1
  B.Cu w0.203: v1(54.82,54.84) 57.12,57.14 62.32,57.14 65.02,59.84 65.02,62.499 67.561,65.04 89.918,65.04 ; v1(110.52,23.54) 96.117,37.943 96.117,39.043 89.92,45.24 89.92,59.34 89.918,59.342 89.918,65.04 ; v1(114.22,38.04) 114.22,39.664 112.989,40.894 112.522,40.894 92.829,60.587 92.829,65.04 ; v1(116.22,48.94) 107.061,48.94 95.42,60.581 95.42,65.03 95.43,65.04 ; v1(116.42,60.54) 111.92,65.04 95.43,65.04 ; 89.918,65.04 92.829,65.04 ; 92.829,65.04 95.43,65.04
NetDBY1_1: DBY1.1 DBY2.1 DBY3.1 DBY4.1 R4.1 | length 204.1
  F.Cu w0.203: R4.1@53.357,49.826 54.608,49.826 v1(56.718,51.937) ; v1(77.02,60.74) 88.72,60.74 v1(88.82,60.84) 88.92,60.74 v1(92.116,60.74) v1(93.677,60.74) v1(96.22,60.74) ; v1(110.52,20.54) 116.481,20.54 117.581,21.64 DBY1.1 ; v1(110.52,45.74) 115.803,45.74 116.453,46.39 DBY3.1 ; v1(112.395,38.115) 111.976,37.696 111.976,36.36 113.03,35.306 116.037,35.306 117.328,34.015 DBY2.1 ; v1(116.42,58.24) 116.945,58.765 DBY4.1
  B.Cu w0.203: v1(56.718,51.937) 62.992,51.937 63.271,52.216 63.271,55.087 67.386,59.201 75.481,59.201 v1(77.02,60.74) ; v1(88.82,60.84) 88.82,42.24 v1(110.52,20.54) ; v1(92.116,60.74) 111.97,40.886 111.97,38.54 v1(112.395,38.115) ; v1(93.677,60.74) 108.677,45.74 v1(110.52,45.74) ; v1(96.22,60.74) 100.932,56.027 114.207,56.027 v1(116.42,58.24)
NetR1_2: R1.2 R4.2 U6.4 | length 6.9
  F.Cu w0.203: R4.2@53.357,48.302 53.308,48.254 R1.2 54.839,49.059 v1(55.52,49.74) ; v1(57.62,49.74) 58.145,49.214 U6.4
  B.Cu w0.203: v1(55.52,49.74) v1(57.62,49.74)
NetR2_2: R2.2 R3.2 U7.4 | length 10.1
  F.Cu w0.203: R3.2 53.035,53.334 R2.2 55.016,54.045 57.506,56.534 58.424,56.534 58.712,56.246 58.712,54.359 U7.4 ; R3.2@53.357,53.302 R3.2@53.381,53.326 ; R2.2@54.983,53.326 R2.2@55.357,53.326
SCL: J2.40 P22.26 R7.2 TP27.1 U4.1 | length 51.4
  F.Cu w0.203: v1(75.82,39.14) 76.245,39.565 U4.1 ; R7.2 79.98,11.44 P22.26
  B.Cu w0.203: J2.40 64.742,15.74 67.52,15.74 ; v1(75.82,39.14) 75.82,35.76 76.574,35.006 76.574,27.294 67.52,18.24 67.52,15.74 ; P22.26 75.63,11.43 TP27.1 69.72,13.54 67.52,15.74
SDA: J2.39 P22.24 R8.2 TP26.1 U4.2 | length 52.9
  F.Cu w0.203: J2.39 64.302,17.84 v1(68.22,17.84) ; U4.2 76.895,39.065 v1(76.92,39.04) ; P22.24 82.558,11.402 R8.2
  B.Cu w0.203: v1(76.92,39.04) 77.313,38.646 77.313,26.934 v1(68.22,17.84) 70.52,15.54 TP26.1 79.923,15.54 81.514,13.95 81.514,12.446 P22.24
U1CTRL: R16.1 TP9.1 U4.9 U5.14 U16.1 | length 42.8
  F.Cu w0.203: R16.1 61.544,41.064 61.92,41.44 v3(61.92,42.14) 61.145,42.914 U16.1 ; v1(80.22,50.94) 80.795,50.365 U4.9 ; U5.14 86.095,56.515 v1(86.12,56.54)
  B.Cu w0.203: TP9.1 60.82,41.04 v3(61.92,42.14) 63.42,43.64 63.42,44.624 64.262,45.466 67.269,45.466 68.526,46.722 75.159,46.722 79.377,50.94 v1(80.22,50.94) 81.578,50.94 86.12,55.481 v1(86.12,56.54)
U1VC1: C18.2 TP16.1 U1.3 U7.6 U16.4 | length 60.1
  F.Cu w0.203: v3(53.391,26.791) 53.391,41.777 55.955,44.341 58.857,44.341 58.857,45.125 v1(57.912,46.07) ; v1(58.649,51.023) 58.649,52.706 U7.6 ; U1.3 65.84,9.04 C18.2 66.51,9.71 v1(66.924,9.71)
  B.Cu w0.203: v3(53.391,26.791) 53.642,26.54 TP16.1 61.72,23.14 61.72,13.54 63.399,11.861 64.773,11.861 v1(66.924,9.71) ; v1(57.912,46.07) 58.649,46.806 v1(58.649,51.023)
U1VC2: C17.2 TP17.1 U1.7 U6.6 U16.6 | length 45.8
  F.Cu w0.203: v1(55.494,24.896) 55.494,39.745 58.663,42.914 U16.6 ; v3(57.948,9.214) 57.998,9.265 C17.2 59.153,9.04 U1.7 ; U16.6@58.582,42.914 U16.6 ; U6.6 58.857,46.903 59.92,45.84 59.92,43.274 59.56,42.914 U16.6
  B.Cu w0.203: v1(55.494,24.896) 55.626,24.764 TP17.1 56.627,20.253 56.627,10.535 v3(57.948,9.214)
U2CTRL0: R13.1 TP10.1 U4.12 U5.17 U8.2 U10.1 U12.6 U14.2 | length 69
  F.Cu w0.203: v1(68.555,47.604) 68.555,47.377 v1(70.334,45.597) 70.334,44.27 71.039,43.565 72.608,41.996 75.687,41.996 78.853,45.162 78.857,45.162 ; v1(70.551,50.286) 70.311,50.526 70.311,50.778 ; U12.6 71.003,56.136 71.267,55.871 71.267,52.77 70.52,52.023 U14.2 70.52,50.987 70.311,50.778 ; U12.6@71.119,56.993 71.119,57.277 U12.6@71.119,57.027 ; U8.2 70.526,67.98 70.104,67.558 70.104,67.025 71.094,66.035 71.094,65.247 U10.1 71.125,64.545 70.871,64.292 67.823,64.292 66.827,63.296 66.827,54.796 68.731,52.892 68.731,50.854 68.655,50.778 R13.1 70.311,50.778 ; U4.12 78.845,45.162 78.857,45.162 ; U5.17 82.748,54.565 81.209,53.026 81.209,45.737 80.634,45.162 78.857,45.162
  B.Cu w0.203: v1(68.555,47.604) 68.555,48.183 70.551,50.179 v1(70.551,50.286) ; v1(70.334,45.597) 72.077,45.597 TP10.1
U2CTRL1: R12.1 TP11.1 U4.13 U5.18 U8.1 U10.6 U12.1 U14.1 | length 41.9
  F.Cu w0.203: U8.1@71.02,67.33 U8.1 71.857,66.694 71.857,66.644 ; U10.6 71.125,62.407 71.628,61.904 71.628,59.562 U12.1 71.003,58.689 71.623,58.069 71.623,52.575 71.17,52.121 U14.1 ; U10.6@71.125,63.372 71.857,64.104 71.857,66.644 ; U14.1@71.17,51.58 U14.1 ; U14.1@71.17,51.59 U14.1 ; R12.1 72.288,70.477 72.288,67.075 71.857,66.644 ; U4.13 78.195,47.965 v1(76.22,49.94) 75.82,50.34 72.733,50.34 71.583,51.49 U14.1 ; v1(83.12,53.44) 83.595,53.915 U5.18
  B.Cu w0.203: v1(76.22,49.94) 79.72,53.44 TP11.1 v1(83.12,53.44)
U2V1: C14.1 DAG2.2 DAY2.2 TP18.1 U2.4 U12.4 | length 90
  F.Cu w0.203: v1(18.72,42.94) 18.72,43.174 21.895,46.349 C14.1 22.76,46.478 U2.4 ; v1(68.423,56.506) 68.853,56.936 U12.4
  F.Cu w0.508: DAY2.2 4.695,34.015 v3(4.07,34.64) 4.67,35.24 DAG2.2
  B.Cu w0.203: v3(4.07,34.64) TP18.1 v1(18.72,42.94) 20.467,41.193 50.308,41.193 51.409,40.092 55.783,40.092 69.444,53.753 69.444,54.985 68.456,55.973 68.456,56.473 v1(68.423,56.506)
U2V2: C15.2 DAG3.2 DAY3.2 TP19.1 U2.2 U10.4 | length 86.6
  F.Cu w0.203: v1@21.682,47.477 v1(21.62,47.54) 22.609,47.54 22.671,47.477 U2.2 ; v1(66.04,56.026) v1(66.04,59.455) ; v1(68.748,63.281) 69.76,63.281 U10.4
  F.Cu w0.508: DAY3.2 4.67,46.39 v3(4.07,46.99) 4.695,47.615 DAG3.2
  B.Cu w0.203: v3(4.07,46.99) 4.12,47.04 TP19.1 ; TP19.1@15.97,46.99 TP19.1 ; v1(66.04,56.026) 65.406,56.026 63.72,54.34 63.72,49.062 58.998,44.34 24.82,44.34 v1(21.62,47.54) 21.12,47.04 TP19.1 ; v1(66.04,59.455) 66.04,60.979 68.341,63.281 v1(68.748,63.281)
U2V3: C13.1 DAG1.2 DAY1.2 TP20.1 U2.7 U14.4 | length 89.1
  F.Cu w0.203: U2.7 26.922,46.478 27.864,45.536 C13.1 28.62,44.729 v1(28.62,38.34) ; v1(66.72,49.54) 69.82,49.54 U14.4
  F.Cu w0.508: DAY1.2 4.67,21.64 v3(4.07,22.24) 4.695,22.865 DAG1.2
  B.Cu w0.203: v3(4.07,22.24) 13.22,22.24 TP20.1 28.62,37.64 v1(28.62,38.34) 54.596,38.34 65.796,49.54 v1(66.72,49.54)
U2V4: C16.2 DAG4.2 DAY4.2 TP21.1 U2.9 U8.4 | length 87.3
  F.Cu w0.203: U2.9 27.214,47.477 27.584,47.848 C16.2 27.52,48.649 v1(27.52,50.94) ; v1@27.513,51.046 27.52,51.04 v1(27.52,50.94) ; v1@27.584,50.875 v1(27.52,50.94) ; v1@27.603,50.94 v1(27.52,50.94) ; U8.4@69.27,68.68 U8.4 66.935,68.63 65.176,66.872 65.176,59.684 62.941,57.449 33.985,57.449 27.52,50.983 v1(27.52,50.94)
  F.Cu w0.508: DAY4.2 4.695,58.765 v3(4.07,59.39) 4.67,59.99 DAG4.2
  B.Cu w0.203: v3(4.07,59.39) 11.97,59.39 17.82,53.54 TP21.1 v1(27.52,50.94)
U3CTRL0: R15.1 TP12.1 U4.10 U5.15 U9.2 U11.1 U13.6 U15.2 | length 51.1
  F.Cu w0.203: 71.984,62.859 71.984,62.856 ; v1@72.867,55.62 71.984,56.503 71.984,62.856 ; v1(72.88,55.607) 72.42,55.147 72.42,51.973 73.653,50.74 74.273,50.74 74.52,50.987 U15.2 ; U13.6 75.841,56.921 v1(76.236,56.527) ; U9.2 75.333,68.062 74.625,67.355 74.625,66.44 74.63,66.44 75.229,65.841 U11.1 75.229,64.446 75.085,64.302 73.429,64.302 71.984,62.856 ; v1(76.92,52.64) 80.145,49.415 U4.10 ; v1(82.02,57.04) 82.02,55.878 R15.1 82.007,55.865 U5.15
  B.Cu w0.203: v1(76.236,56.527) 76.243,56.534 v1@76.243,56.54 ; v1(76.92,52.64) 75.12,54.44 74.047,54.44 v1(72.88,55.607) ; v1(82.02,57.04) TP12.1 80.22,56.54 v1@76.243,56.54 ; v1(72.88,55.607) 73.813,56.54 v1@76.243,56.54 ; v1(72.88,55.607) 72.92,55.64 72.887,55.607 v1(72.88,55.607)
U3CTRL1: R14.1 TP13.1 U4.11 U5.16 U9.1 U11.6 U13.1 U15.1 | length 45.4
  F.Cu w0.203: v1(73.264,67.766) 74.224,68.726 76.085,68.726 U9.1 ; U9.1@76.012,68.8 U9.1 ; v1(76.49,71.916) 76.528,71.878 R14.1 76.655,70.716 76.655,69.283 76.1,68.728 U9.1 ; v1(76.53,65.729) 76.53,63.718 75.967,63.154 U11.6 75.229,62.763 76.073,61.919 76.073,60.083 75.224,59.234 U13.1 75.224,58.755 77.061,56.918 77.061,55.34 ; U4.11 79.495,47.624 75.628,51.49 U15.1 75.322,51.642 75.322,52.049 77.061,53.788 77.061,55.34 ; U5.16 82.695,55.215 82.42,54.94 78.12,54.94 77.72,55.34 77.061,55.34
  B.Cu w0.203: v1(73.264,67.766) 73.264,66.776 74.071,65.968 76.291,65.968 v1(76.53,65.729) ; TP13.1 76.49,73.016 v1(76.49,71.916)
U3V1: C20.1 DBG3.2 DBY3.2 TP22.1 U3.4 U11.4 | length 68.2
  F.Cu w0.203: v1(72.945,62.158) 72.945,62.822 73.241,63.118 73.893,63.118 U11.4 ; v1(78.72,62.14) v1(94.12,62.14) ; U3.4 102.068,47.477 102.079,47.467 106.604,47.467 107.077,47.94 v1(109.32,47.94)
  F.Cu w0.508: DBY3.2 120.32,46.39 v3(120.97,47.04) 120.395,47.615 DBG3.2
  B.Cu w0.203: v1@72.978,62.191 v1@78.593,62.191 ; v1(94.12,62.14) 94.12,61.378 107.558,47.94 v1(109.32,47.94) TP22.1 111.355,48.575 115.585,48.575 117.12,47.04 v3(120.97,47.04)
U3V2: C21.2 DBG2.2 DBY2.2 TP23.1 U3.2 U13.4 | length 76.8
  F.Cu w0.203: v1(73.068,54.44) 73.924,55.297 U13.4 ; v1(83.52,59.54) 92.22,59.54 v1(94.42,57.34) ; U3.2 102.005,46.478 102.027,46.456 v3(103.617,46.456) v3@103.595,46.478
  F.Cu w0.508: DBY2.2 120.345,34.015 v3(120.97,34.64) 120.37,35.24 DBG2.2
  B.Cu w0.203: v1(73.068,54.44) 72.674,54.046 72.674,52.421 73.442,51.653 76.969,51.653 81.709,56.392 82.331,56.392 83.52,57.581 v1(83.52,59.54) ; v1(94.42,57.34) 99.248,52.512 99.248,49.483 100.63,48.102 102.255,48.102 103.617,46.74 v3(103.617,46.456) 104.511,45.562 104.511,43.855 TP23.1 ; TP23.1@104.555,43.805 112.62,35.74 115.82,35.74 116.92,34.64 v3(120.97,34.64)
U3V3: C19.1 DBG4.2 DBY4.2 TP24.1 U3.7 U9.4 | length 65.4
  F.Cu w0.203: U9.4 92.043,67.412 98.62,60.835 v1(98.62,59.34) 94.981,55.701 94.981,49.372 C19.1 96.931,47.421 98.463,47.421 U3.7
  F.Cu w0.508: DBY4.2 120.395,58.765 v3(120.97,59.34) 120.32,59.99 DBG4.2
  B.Cu w0.203: v1(98.62,59.34) TP24.1 v3(120.97,59.34)
U3V4: C22.2 DBG1.2 DBY1.2 TP25.1 U3.9 U15.4 | length 97.6
  F.Cu w0.203: v1(72.52,49.54) 72.57,49.59 U15.4 ; v3(94.648,39.668) 94.648,44.253 C22.2 96.872,46.478 U3.9
  F.Cu w0.508: DBY1.2 120.37,21.64 v3(120.97,22.24) 120.345,22.865 DBG1.2
  B.Cu w0.203: v1(72.52,49.54) 72.126,49.934 72.126,55.811 73.213,56.898 74.639,56.898 79.229,61.488 89.131,61.488 89.468,61.151 89.468,44.848 v3(94.648,39.668) 95.52,38.796 TP25.1 109.786,22.606 117.054,22.606 117.42,22.24 v3(120.97,22.24)
VCC: C23.2 C24.2 C25.2 C26.2 C27.2 C28.2 C29.2 C30.2 C31.2 C32.2 C33.2 C34.2 C35.2 DA0.2 DB0.2 J1.2 P1.1 P1.3 P1.5 P20.3 P22.11 P28.1 R7.1 R8.1 R9.1 R10.2 R11.2 R12.2 R13.2 R14.2 R15.2 R16.2 TP15.1 U4.16 U5.20 U6.3 U6.5 U7.3 U7.5 U8.5 U9.5 U10.5 U11.5 U12.5 U13.5 U14.5 U15.5 U16.5 | length 52
  F.Cu w0.203: v1(4.02,9.54) 4.97,10.49 DA0.2 ; R16.2 59.095,39.965 v3(59.12,39.94) ; v1(66.82,52.34) 66.858,52.302 R13.2 ; v1(72.02,38.04) R9.1 ; R12.2 74.052,71.878 v1(74.09,71.916) ; v1(74.52,11.44) R7.1 ; R14.2 78.052,71.878 v1(78.09,71.916) ; v1(79.22,55.84) R15.2 ; R8.1 v1(85.22,8.94) ; DB0.2 120.07,10.49 v1(121.02,9.54)
  F.Cu w0.279: C25.2 C25.2@70.485,60.764 ; R10.2 v2@75.222,44.822 ; v2(75.222,44.916) 75.093,45.046 C34.2 75.407,46.465 U4.16 ; R11.2 83.52,49.097 v2(83.52,50.037) C35.2 83.52,52.003 84.132,52.615 U5.20
  F.Cu w0.305: C33.2 v2@57.384,43.382 ; C23.2 56.545,48.594 v2(57.513,48.594) 58.827,48.594 U6.5 U6.5@58.8,48.508 ; C28.2 v2@57.513,53.281 ; v2(57.45,43.316) 57.698,43.564 U16.5 ; v2(57.544,53.311) 57.797,53.564 U7.5 ; U6.3 v2(60.857,50.164) ; U7.3 v2(60.857,55.164) ; C24.2 v2@68.105,67.332 ; v2@68.119,67.33 U8.5 ; C26.2 v2(70.353,55.529) U12.5 ; U10.5@70.399,63.139 U10.5 v2@70.475,61.899 ; C25.2 v2@70.409,61.833 ; v2@71.17,48.433 U14.5 ; C27.2 v2@71.222,48.381 ; C31.2 v2@74.513,55.336 ; v2@74.574,55.742 U13.5 ; v2@74.579,61.498 U11.5 ; C30.2 v2@74.818,61.259 ; C32.2 v2@75.077,48.472 ; v2(75.169,48.564) U15.5 ; U9.5 v2@79.147,68.712 ; v2(79.154,68.719) C29.2
  B.Cu w0.203: TP15.1 v1(66.82,52.34)
  other v2: 71.191,48.411 74.747,55.569 74.704,61.373 70.467,61.891 68.113,67.324
pads on no net: J1.3 J1.4 J1.5 J1.6 J1.7 J1.8 J1.9 J1.10 J1.11 J1.12 J1.13 J1.14 J1.15 J1.16 J1.17 J1.18 J1.19 J1.20 J1.21 J1.22 J1.23 J1.24 J1.25 J1.26 J1.27 J1.28 J1.29 J1.30 J1.31 J1.32 J1.33 J1.34 J1.35 J1.36 J1.37 J1.38 J1.39 J1.40 J2.2 J2.3 J2.4 J2.5 J2.11 J2.12 J2.13 J2.14 J2.15 J2.16 J2.17 J2.18 J2.19 J2.20 J2.21 J2.22 J2.23 J2.24 J2.25 J2.26 J2.27 J2.28 J2.29 J2.30 J2.31 J2.32 J2.33 J2.34 J2.35 J2.36 J2.37 J2.38 P9.4 P9.5 P9.6 P9.7 P9.10 P9.11 P9.12 P9.13 P20.1 P20.2 P20.4 P20.6 P20.7 P20.8 P20.13 P20.14 P20.16 P20.17 P20.18 P20.20 P20.21 P20.22 P22.1 P22.2 P22.3 P22.5 P22.6 P22.7 P22.8 P22.9 P22.12 P22.13 P22.14 P22.15 P22.16 P22.17 P22.19 P22.20 P22.21 P22.22 P22.23 P22.25 P28.3 P28.4 P28.5 P28.6 P28.7 P28.8 P28.9 P28.10 P28.11 P28.13 P28.14 P28.15 P28.16 P28.17 P28.18 P28.19 P28.20 P28.21 P28.22 U2.3 U3.3 U5.1 U5.7 U5.8 U5.9 U5.11 U5.12 U5.13

## Polygon pours and split planes (outlines as drawn)
VCC on In2.Cu "In2.Cu-" (solid, pour order 1): 64.52,2.54 122.52,2.54 122.52,77.54 111.02,77.54 111.02,75.04 106.62,75.04 106.62,77.54 2.52,77.54 2.52,31.54 2.52,2.54
GND on In1.Cu "In1.Cu-" (solid, remove dead copper, pour order 0): 2.52,77.54 2.52,2.54 122.52,2.54 122.52,77.54 111.02,77.54 111.02,75.04 106.62,75.04 106.62,77.54

## Other copper
F.Cu:
  text "1" at 107.237,75.962 h1.02
In1.Cu:
  text "2" at 108.137,75.959 h1.02
In2.Cu:
  text "3" at 109.146,75.956 h1.02
B.Cu:
  text "4" at 110.002,75.963 h1.02

## Silkscreen, mask and mechanical layers (free items; w line width, h text height)
F.SilkS:
  lines w0.254: 3.684,22.036 3.94,20.462 4.321,18.404 4.88,15.788 5.134,14.747 5.236,14.366 5.337,13.985 5.49,13.629 5.667,13.299 5.82,13.07 6.048,12.765 6.277,12.537 6.531,12.308 6.887,12.054 7.166,11.902 7.547,11.724 8.03,11.572 8.436,11.495 8.919,11.47 69.32,11.47 ccw(c69.32,15.28) 73.13,15.28 73.079,15.89 72.927,16.601 72.673,17.922 72.342,19.674 72.012,21.503 71.682,23.586 71.428,25.465 71.199,27.396 71.022,29.275 70.869,31.282 70.742,33.39 70.742,42.89 70.869,44.922 71.047,47.157 71.25,49.164 71.453,50.942 71.707,52.821 71.987,54.574 72.292,56.326 72.596,57.952 72.927,59.603 73.054,60.314 73.13,61 ccw(c69.32,61) 69.32,64.81 8.919,64.81 8.487,64.785 8.03,64.708 7.623,64.581 7.166,64.378 6.81,64.175 6.48,63.921 6.175,63.642 5.972,63.413 5.794,63.184 5.617,62.905 5.439,62.549 5.337,62.295 5.261,62.016 5.185,61.711 5.109,61.432 4.804,60.06 4.27,57.546 3.932,55.754
  text "Opera Cake" at 22.338,68.397 h4.06
  text "30 October 2018" at 49.946,65.84 h1.78
  text "B4" at 115.088,63.538 h1.02
  text "A4" at 9.056,63.513 h1.02
  text "J1" at 38.359,57.009 h1.02
  text "P9" at 40.203,51.789 h1.02
  text "B3" at 115.107,51.156 h1.02
  text "A3" at 9.075,51.131 h1.02
  text "B2" at 109.602,38.784 h1.02
  text "A2" at 9.07,38.759 h1.02
  text "P28" at 62.304,33.634 h1.02 r90
  text "P20" at 110.604,33.627 h1.02 r90
  text "B1" at 109.604,26.412 h1.02
  text "A1" at 9.072,26.387 h1.02
  text "P1" at 100.404,22.462 h1.02
  text "Optional: Install GreatFET One upside-down instead of connecting to HackRF." at 24.842,18.734 h0.8
  text "A0" at 92.362,18.617 h0.8
  text "A1" at 94.869,18.622 h0.8
  text "A2" at 97.467,18.62 h0.8
  text "A0" at 9.064,14.006 h1.02
  text "B0" at 115.095,14.006 h1.02
  text "J2" at 38.357,10.256 h1.02
  text "P22" at 94.624,8.508 h1.02
  text "https://greatscottgadgets.com/hackrf/" at 80.088,5.641 h1.78
B.SilkS:
  text "Install GreatFET One on opposite side." at 45.8,34.346 h0.8
Edge.Cuts:
  the board outline again, w0.254
Cmts.User:
  circle w0.254: c73.52,33.54 r3
  lines w0.254: 4.22,9.54 4.22,70.54 ; 4.52,9.54 6.52,9.54 cw(c6.52,6.54) 9.52,6.54 ; 9.52,6.04 115.52,6.04 ; 9.52,74.04 115.52,74.04 ; 115.52,6.54 cw(c118.52,6.54) 118.52,9.54 120.52,9.54